# Altium PCB serdes-interface.PcbDoc (part 1 of 3)
Units mm, origin at the board's own origin, x right, y up, seen from the top; angles counter-clockwise.
Board outline 39.62 x 39.62 mm, 6 copper layers (Top Layer, GND1, MidLayer1, VDD_negative, GND2, Bottom Layer); 177 components, 131 nets, 827 pads, 502 vias.
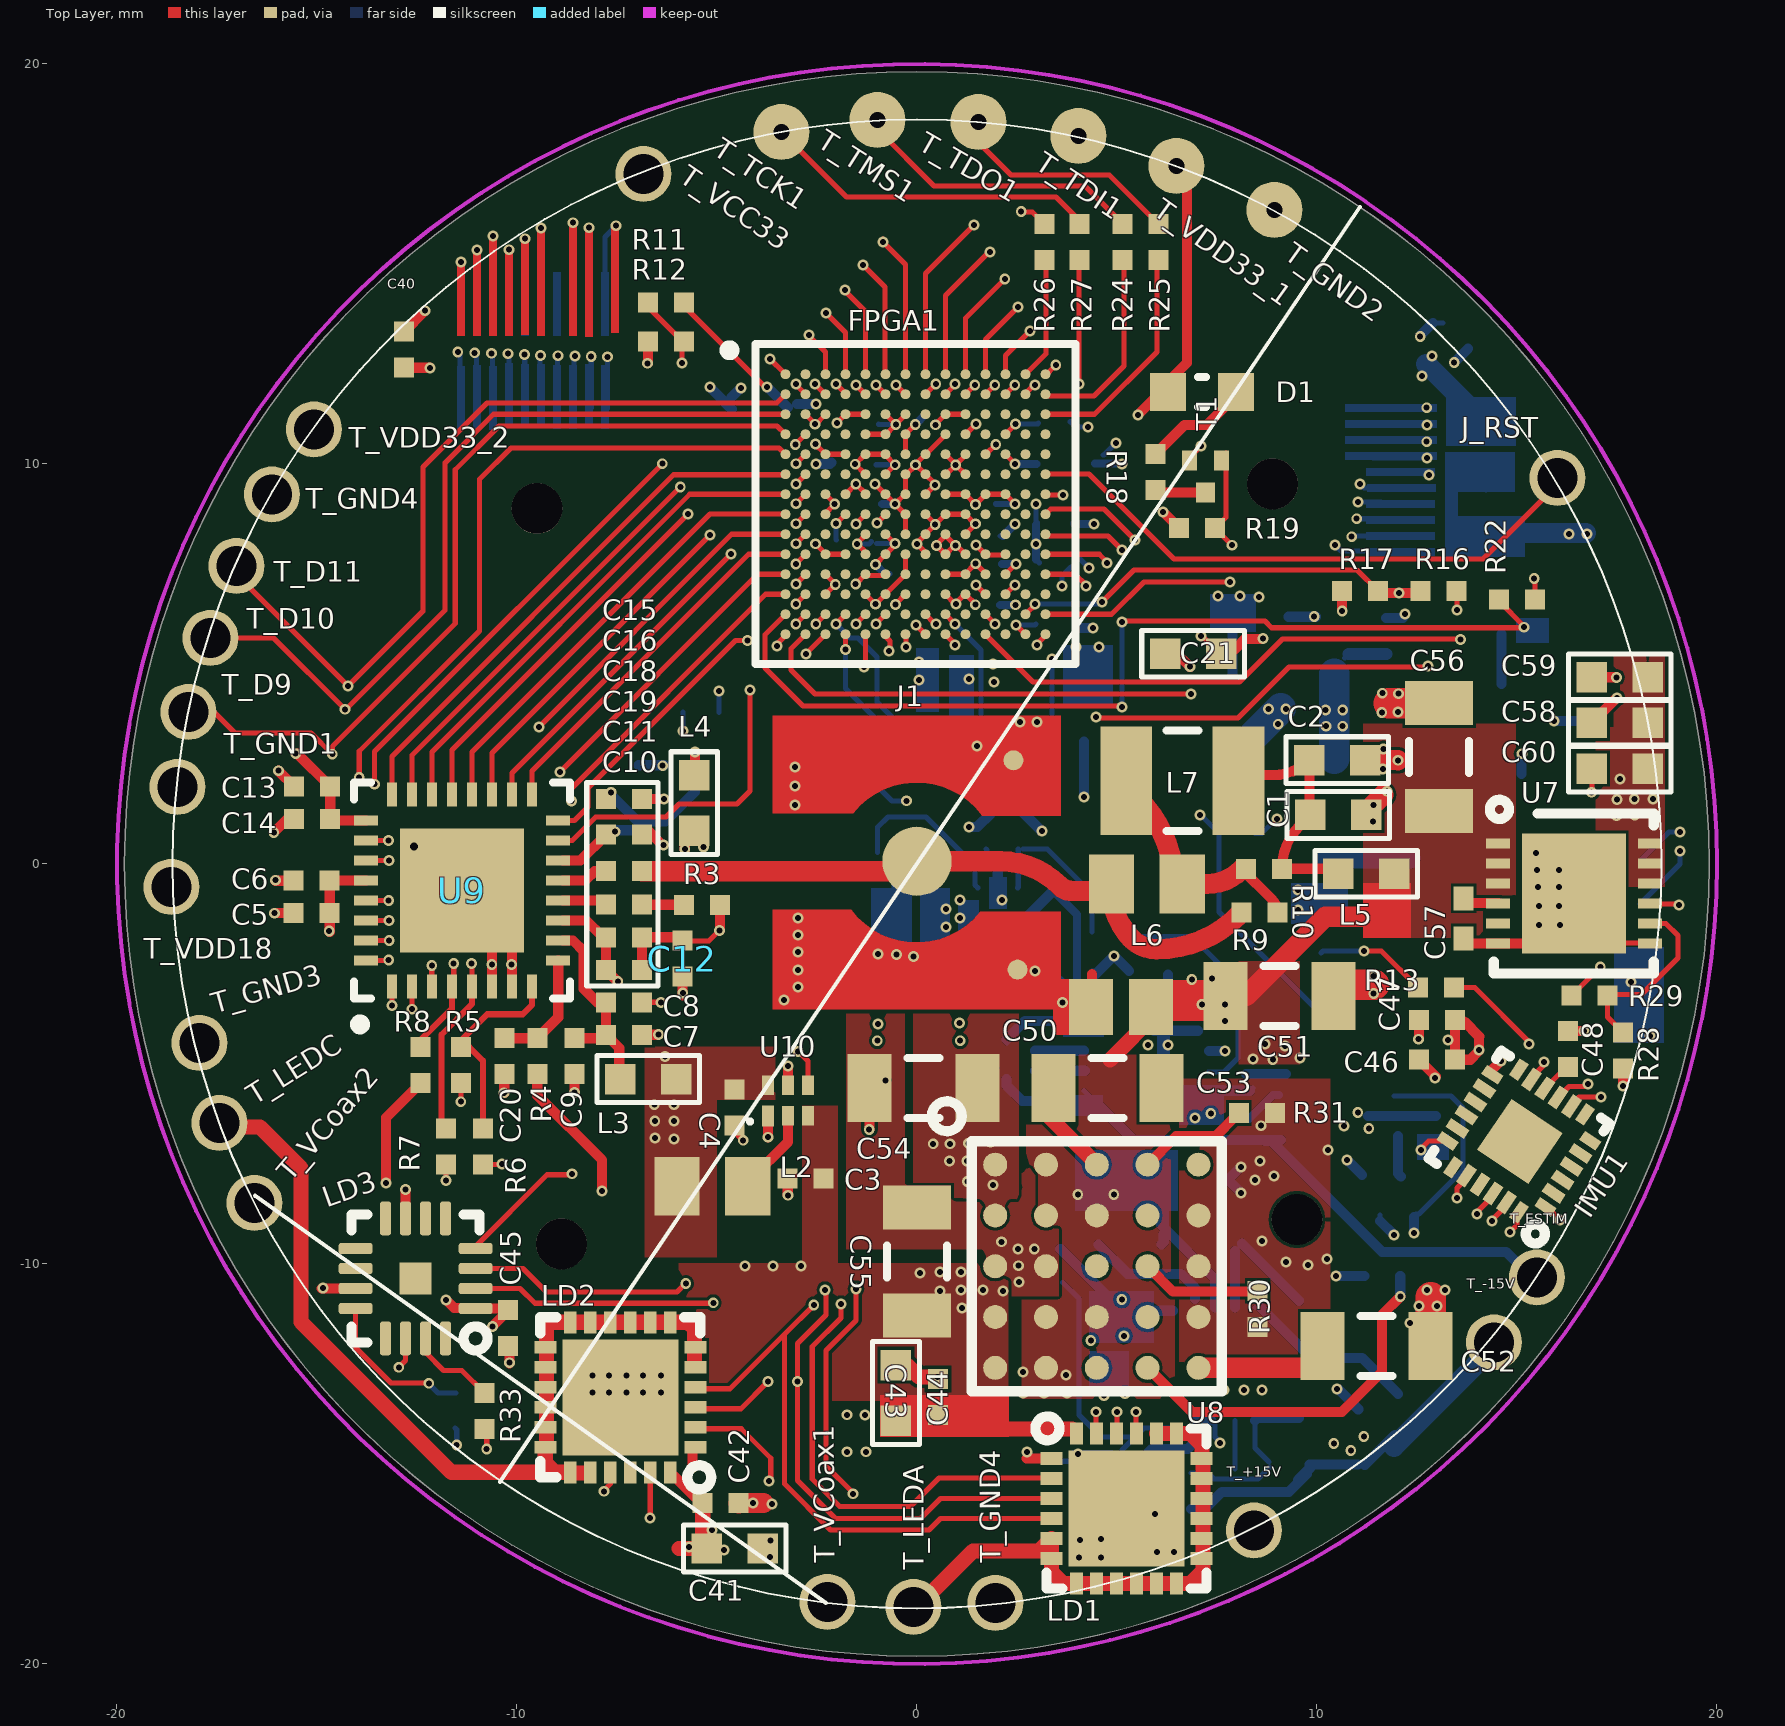
[diagram p0: Top Layer view]
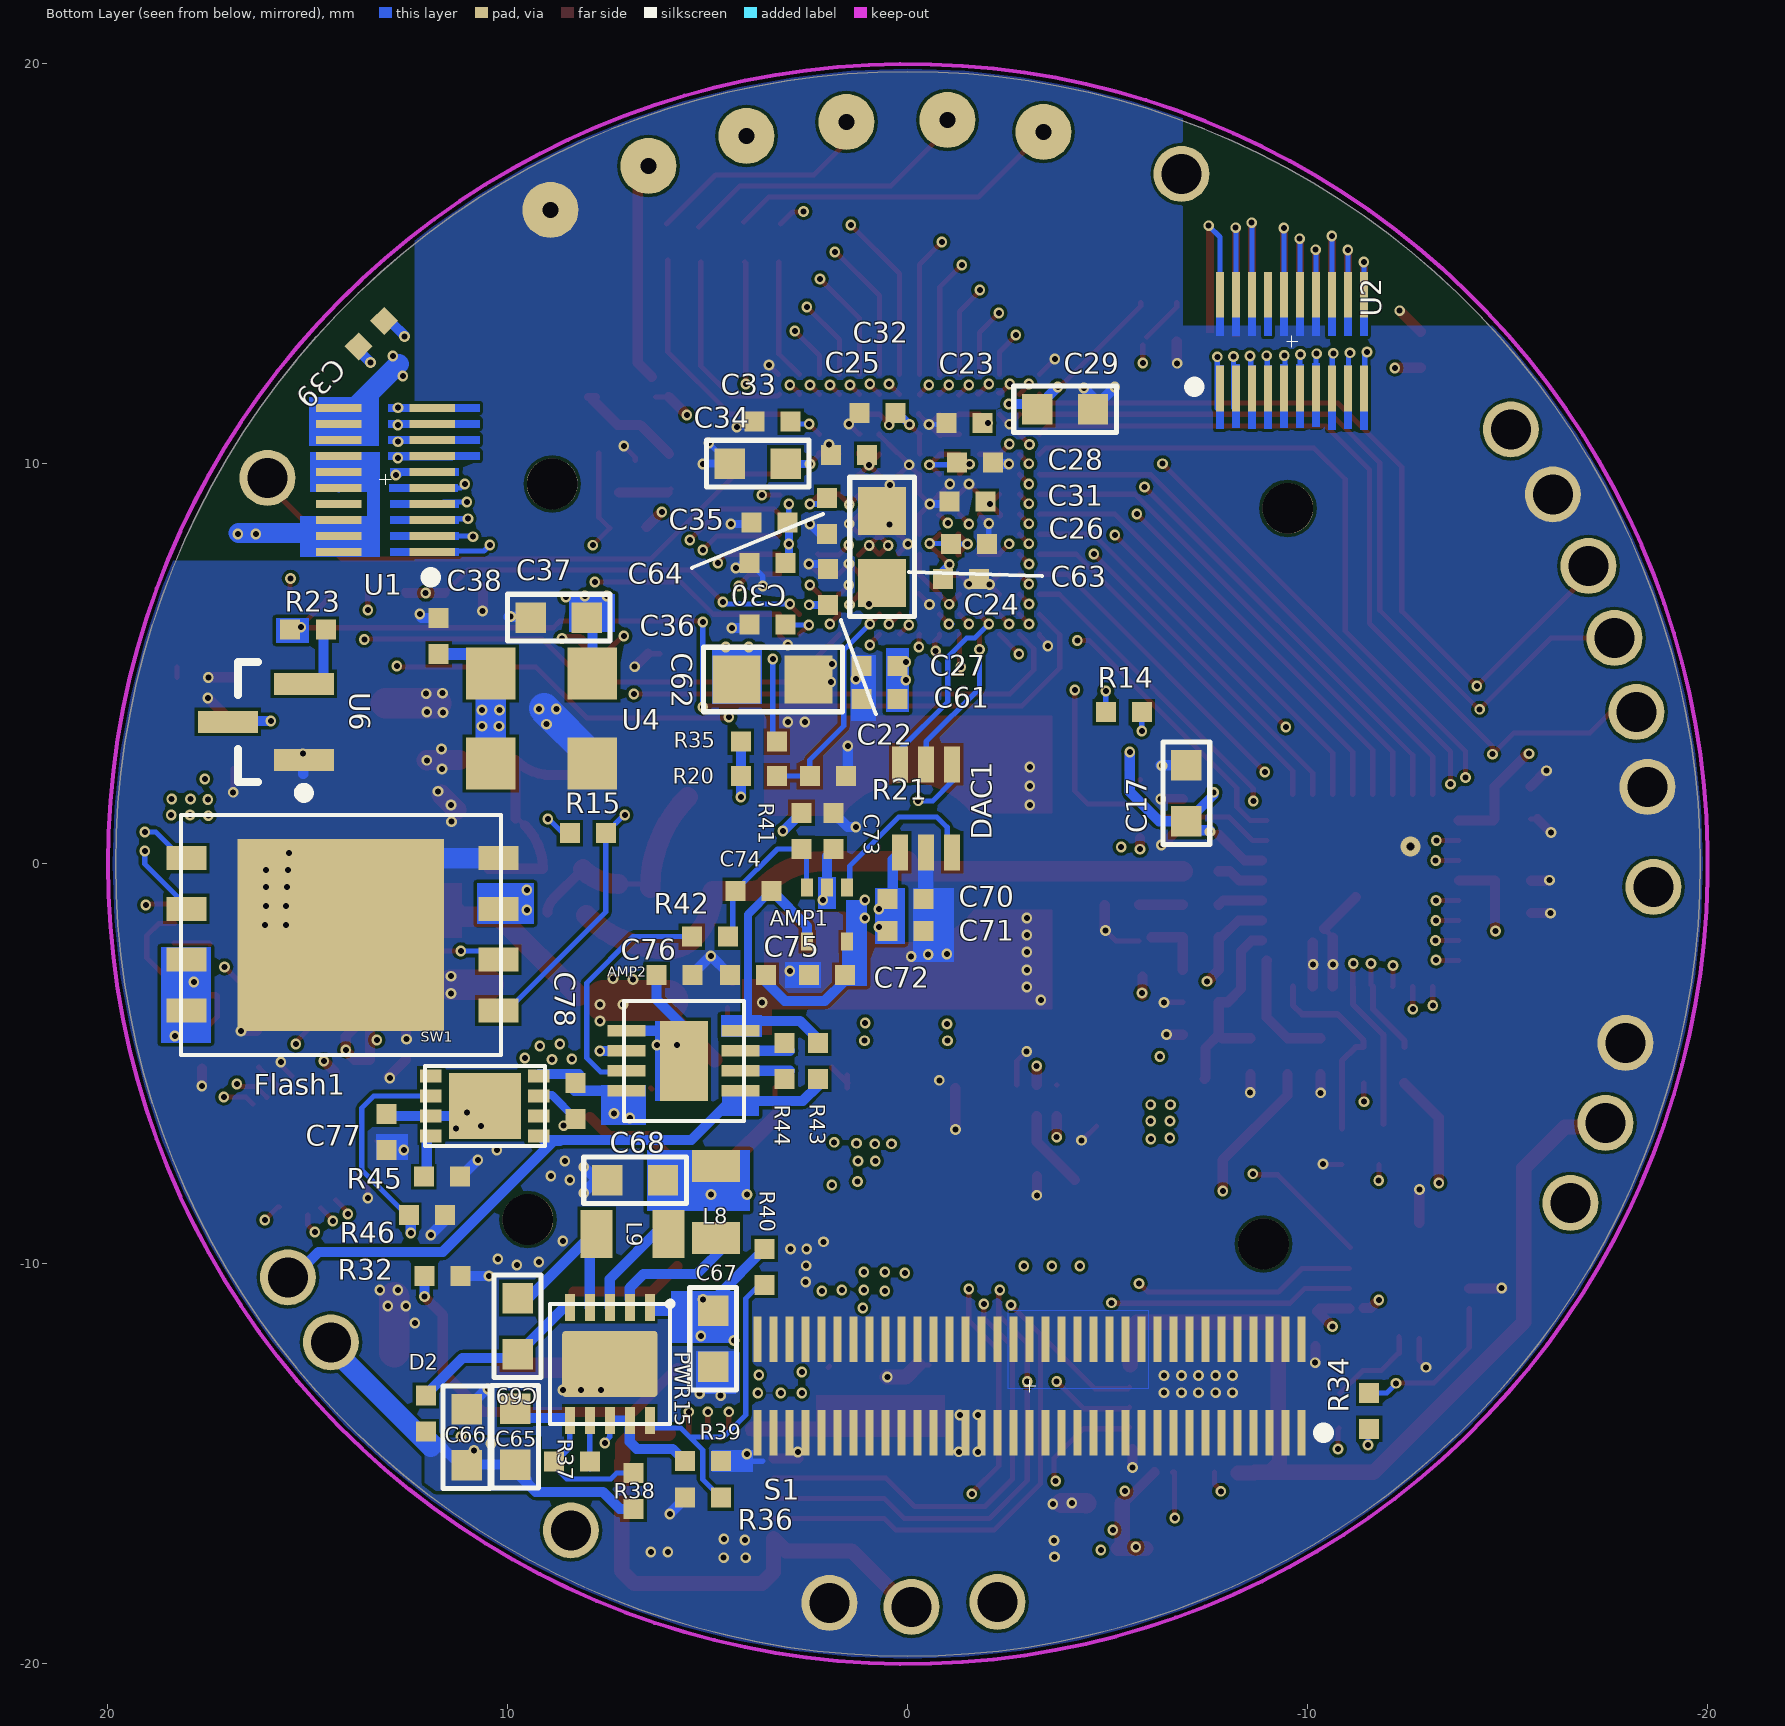
[diagram p1: Bottom Layer view, seen from below]
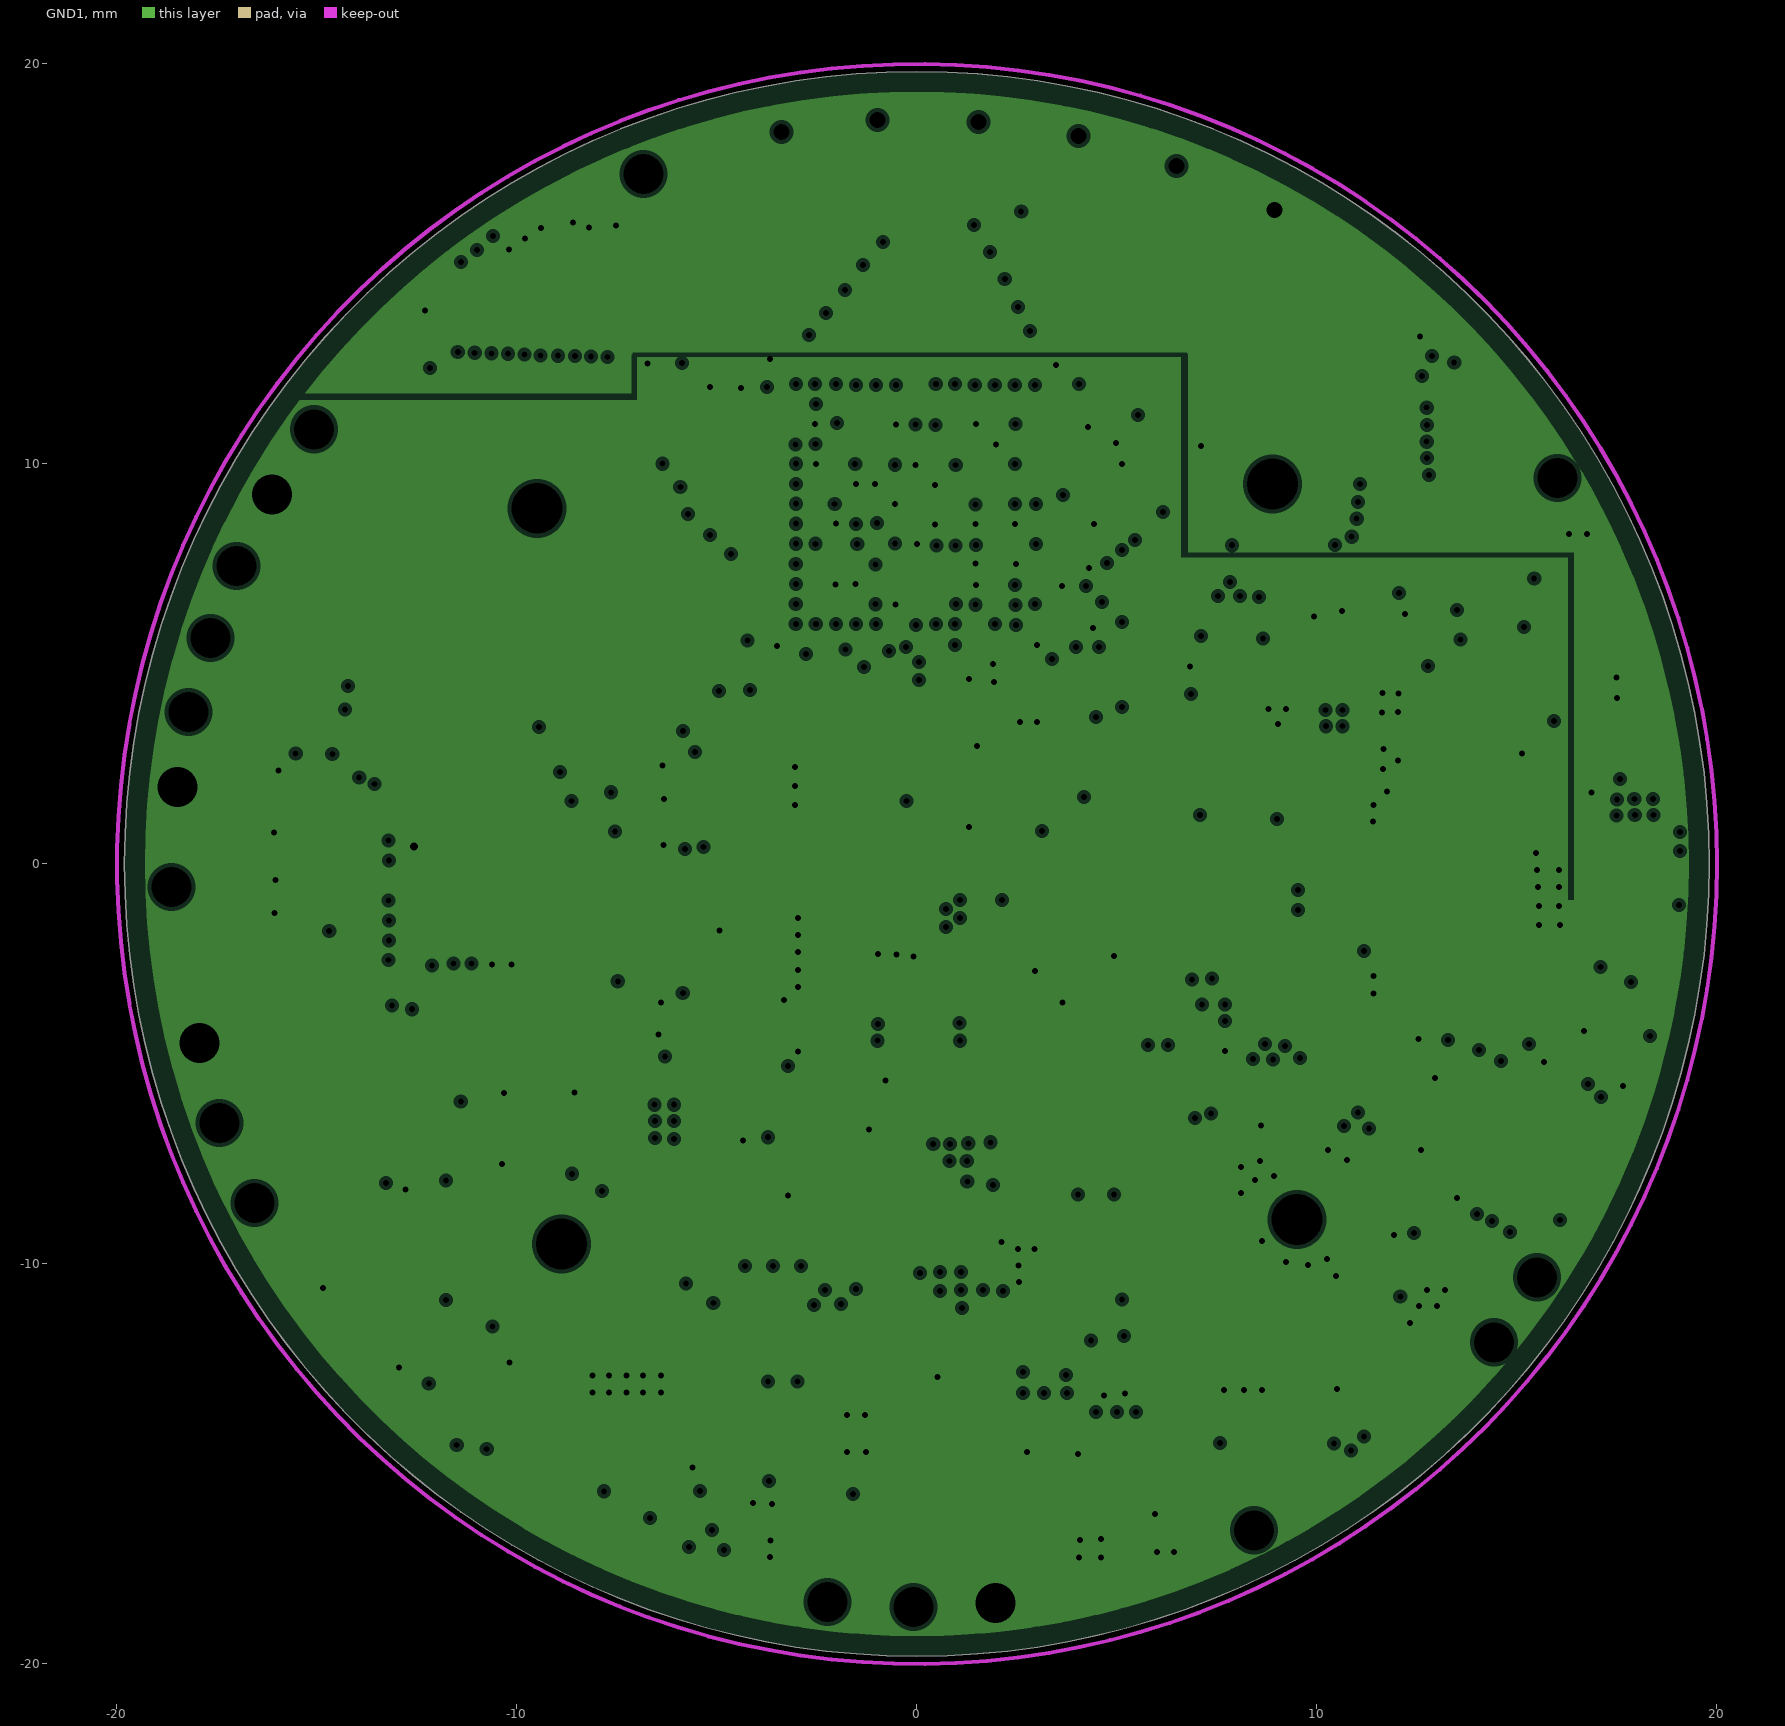
[diagram p2: GND1, clearances drawn from the general rule]
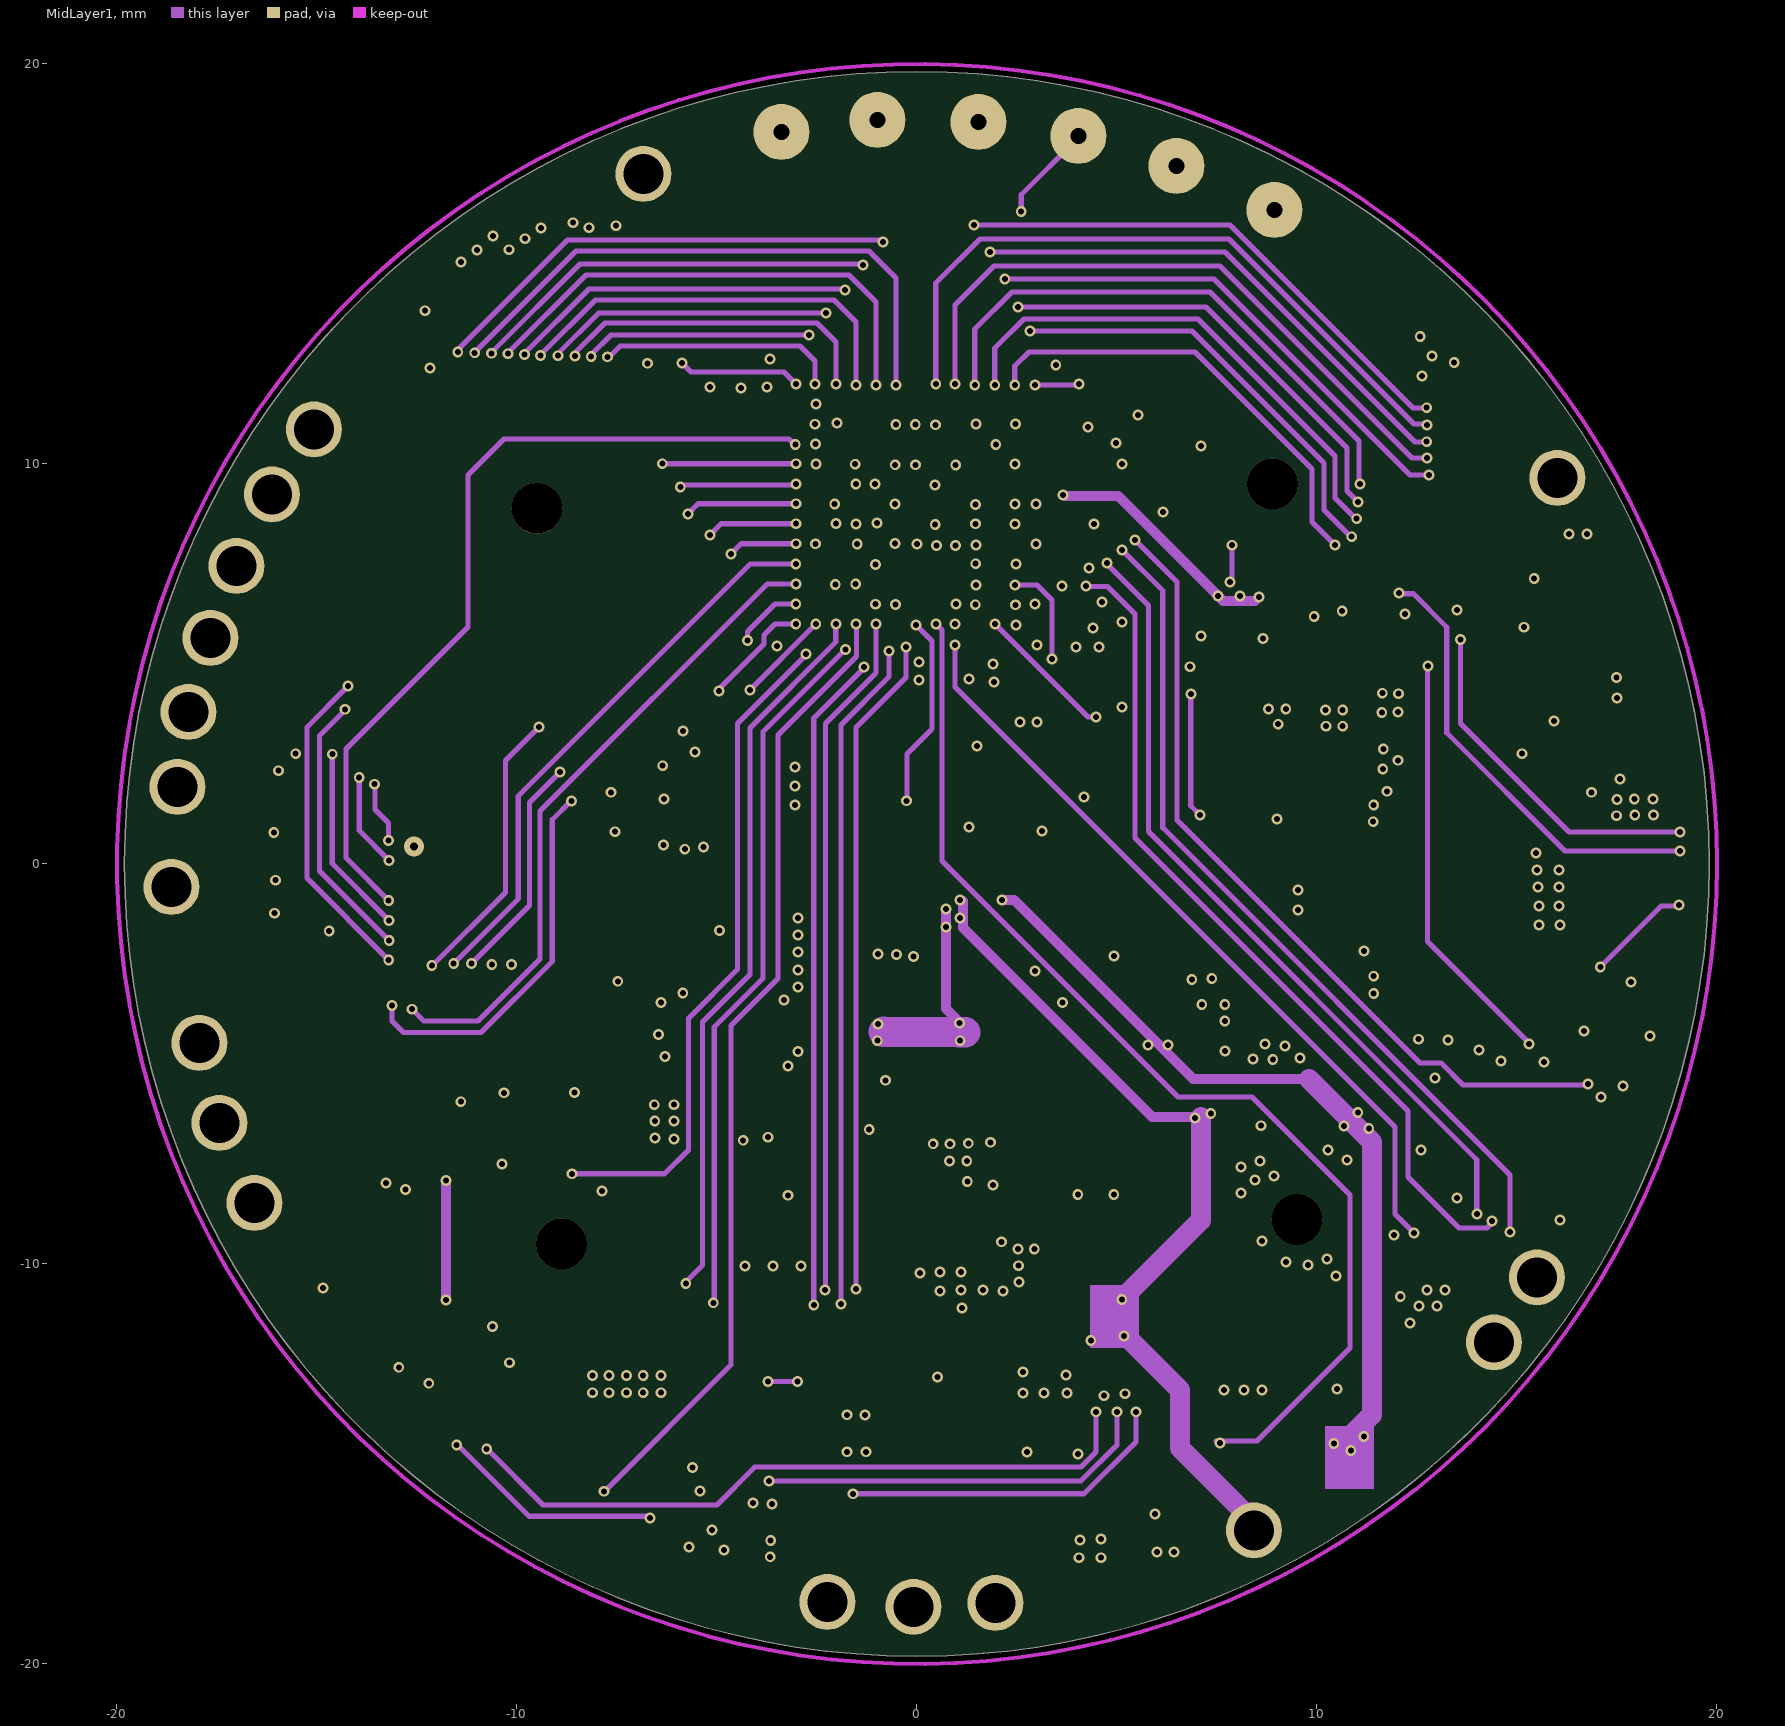
[diagram p3: MidLayer1]
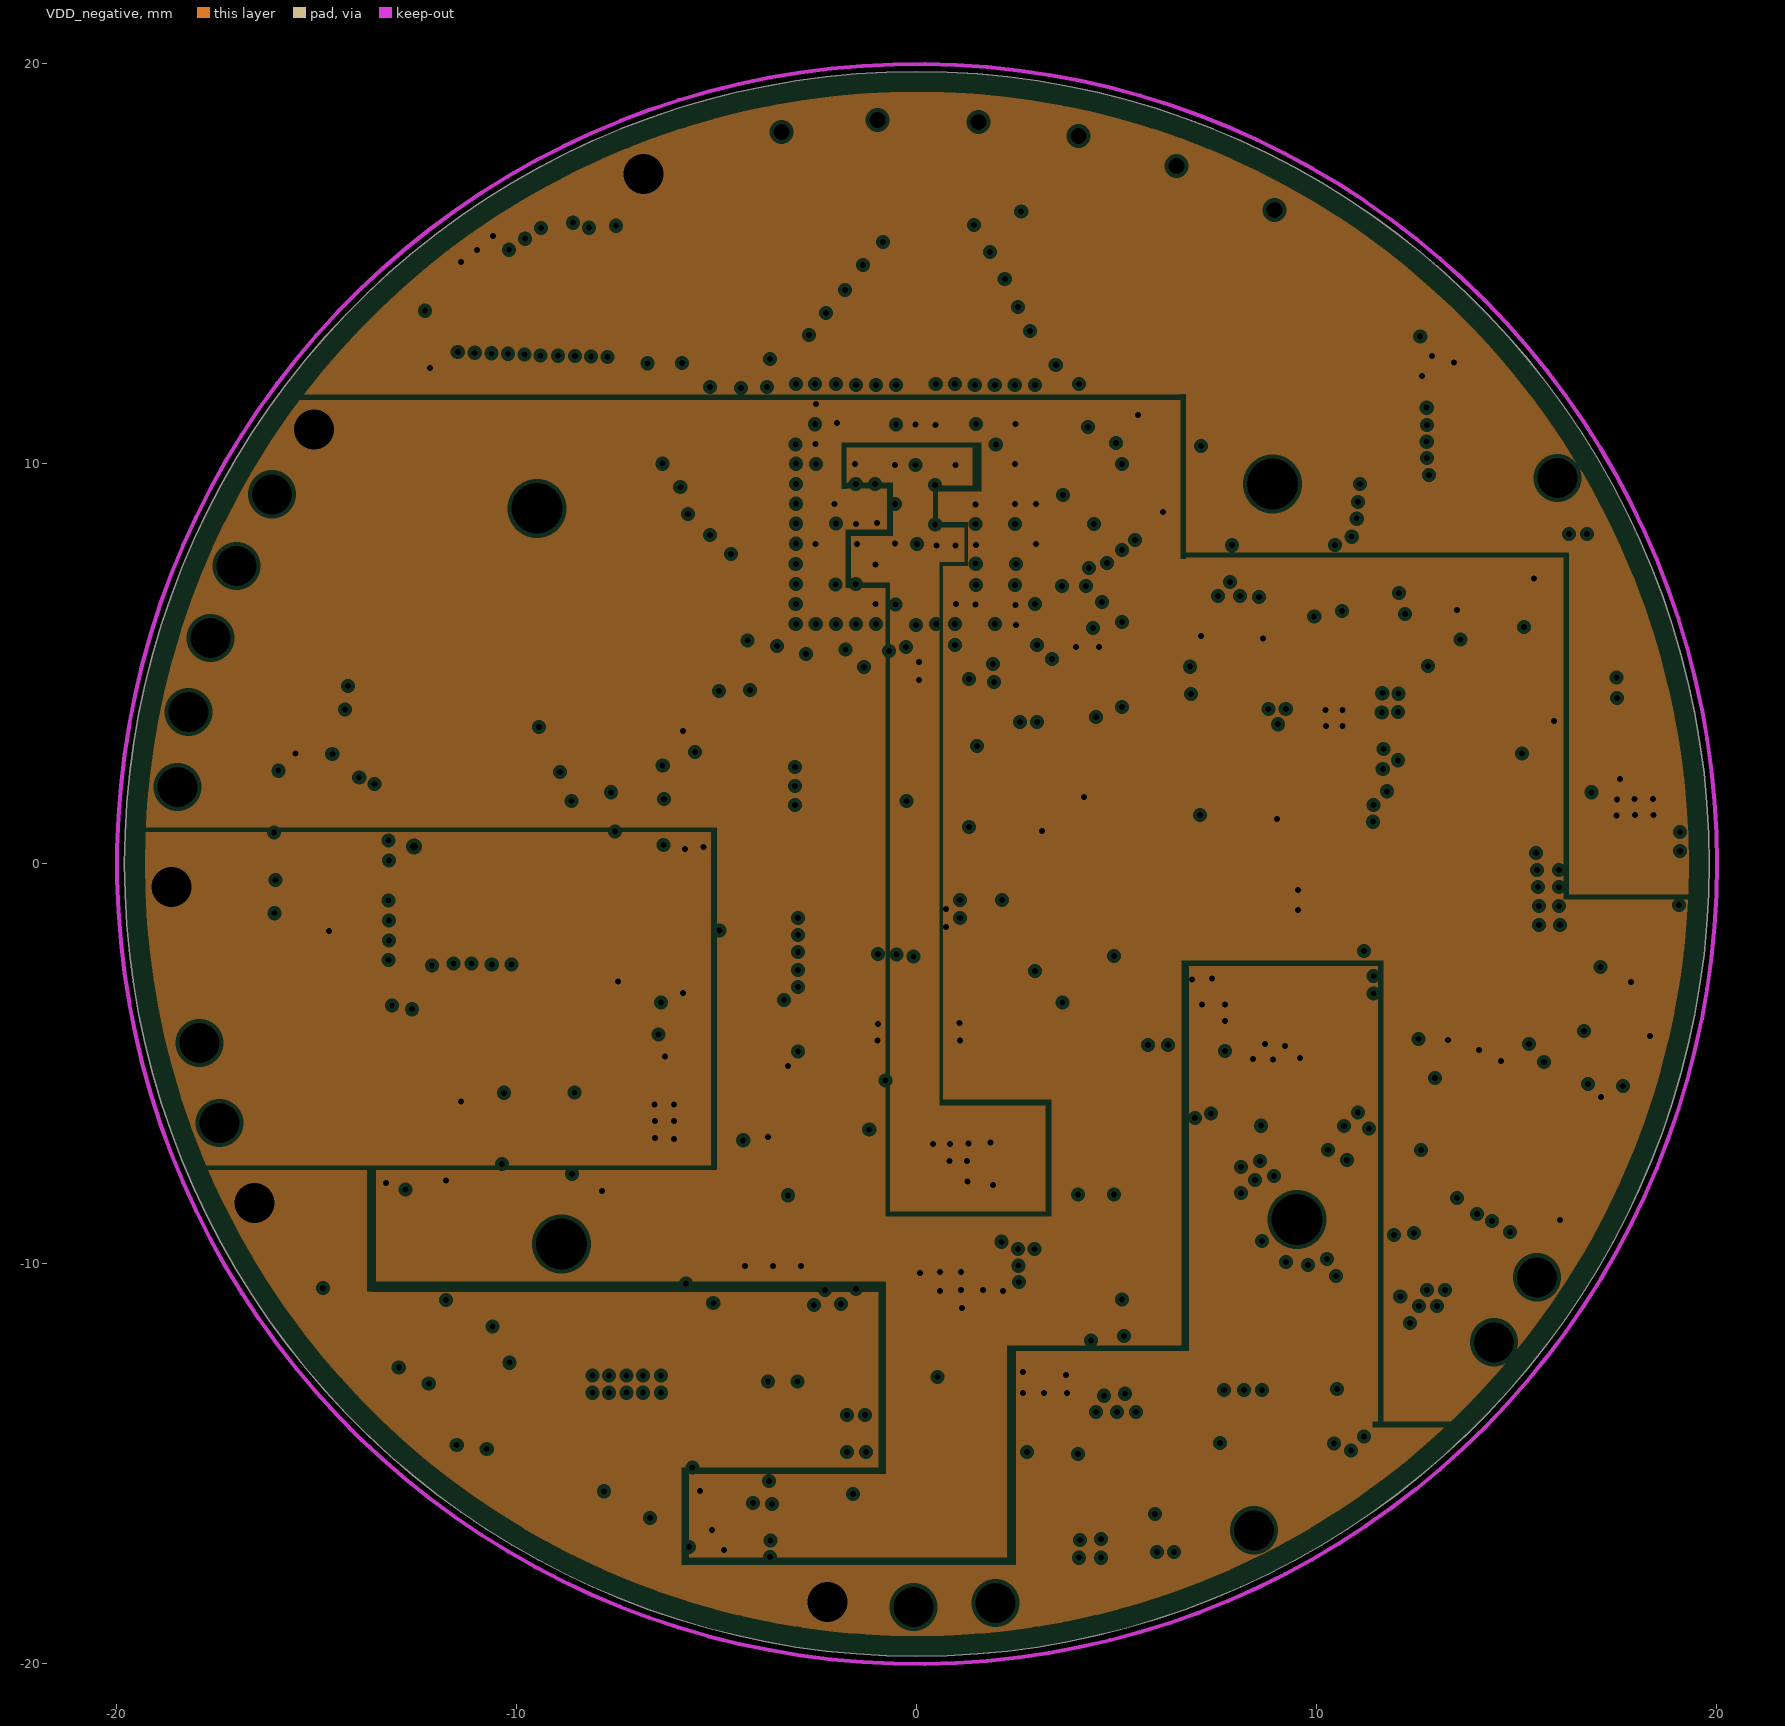
[diagram p4: VDD_negative, clearances drawn from the general rule]
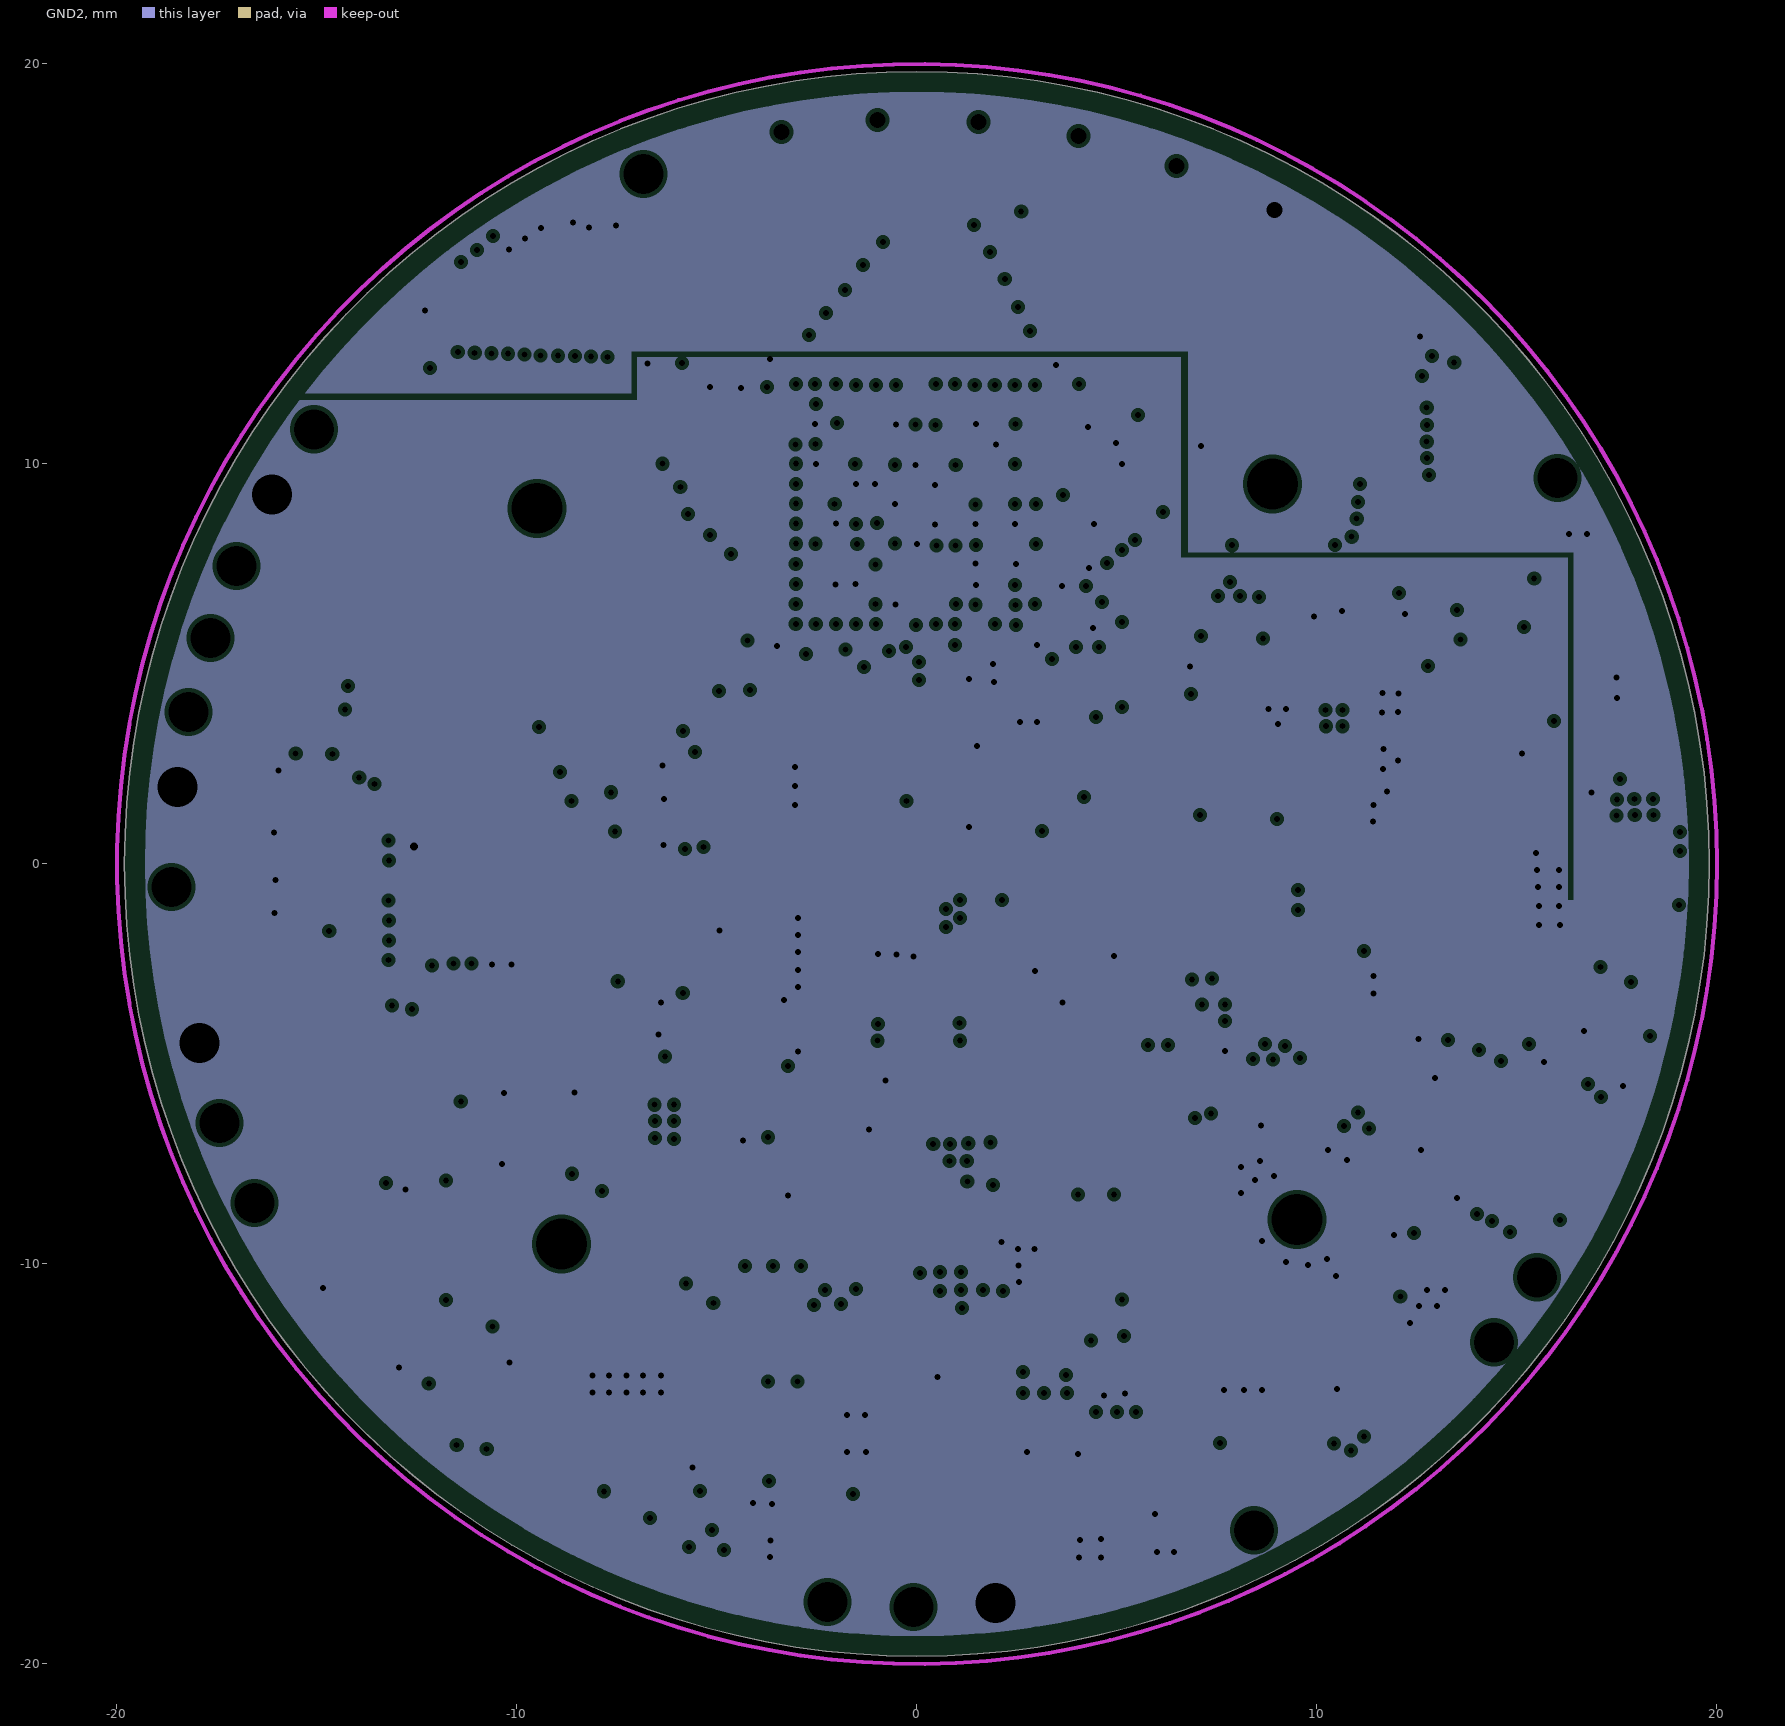
[diagram p5: GND2, clearances drawn from the general rule]

## Layer stack, top to bottom
Top Layer: signal copper 0.0356
Dielectric: core 0.32, FR-4, Dk 4.8
GND1: plane copper 0.0356, net GND
Dielectric: prepreg 0.32, FR-4, Dk 4.8
MidLayer1: signal copper 0.0356
Dielectric: core 0.32, FR-4, Dk 4.8
VDD_negative: plane copper 0.0356, net (Multiple Nets)
Dielectric: prepreg 0.32, FR-4, Dk 4.8
GND2: plane copper 0.0356, net GND
Dielectric: core 0.32, FR-4, Dk 4.8
Bottom Layer: signal copper 0.0356

## Board outline
-19.813,0 ccw(c-0.003,0) -0.003,-19.81 ccw(c-0.003,0) 19.807,0 ccw(c-0.003,0) -0.003,19.81 ccw(c-0.003,0)

## Design rules (kind name [scope] priority, off if disabled: settings)
Clearance [All] p1: gap=0.076
ComponentClearance [All] p1: gap=0.127 collisioncheckmode=3 verticalgap=0.254 showdistances=FALSE
HoleSize [All] p1: absolutevalues=TRUE maxlimit=6.5 minlimit=0.15 maxpercent=80.000 minpercent=20.000
MinimumAnnularRing [All] p1: minimumring=0.06
MinimumSolderMaskSliver [All] p1: minsoldermaskwidth=0
PlaneClearance [All] p1: clearance=0.102
PlaneConnect [All] p1: planeconnectstyle=Direct reliefexpansion=0.508 reliefentries=4 reliefconductorwidth=0.254 reliefairgap=0.254
PolygonConnect [All] p1: connectstyle=Direct reliefconductorwidth=0.254 reliefentries=4 polygonreliefangle="90 Angle" airgapwidth=0.254
RoutingVias [All] p1: holewidth=0.254 width=0.559 viastyle="Through Hole" minholewidth=0.15 minwidth=0.27 maxholewidth=0.711 maxwidth=1.27
SilkToSilkClearance [All] p1: silktosilkclearance=0
SilkToSolderMaskClearance [IsPad] p1: minsilkscreentomaskgap=0 clearancetoexposedcopper=FALSE
SolderMaskExpansion [All] p1: expansion=0.025
Width [All] p1: maxlimit=2.54 minlimit=0.076 preferedwidth=0.13
21 further rules are at their usual default settings.

## Classes and differential pairs
net class DIN[0..11]: DIN0 DIN1 DIN2 DIN3 DIN4 DIN5 DIN6 DIN7 DIN8 DIN9 DIN10 DIN11
component class U_serial-io: C5 C6 C7 C8 C9 C10 C11 C12 C13 C14 C15 C16 C17 C18 C19 C20 L3 L4 R3 R4 R5 R6 R7 R8 U9
component class U_power-supplies: C3 C4 C50 C51 C52 C53 C54 C55 C56 C57 C58 C59 C60 L1 L2 Q5 Q15 Q16 Q17 Q22 Q38 R28 R29 R30 R31 R32 T_VCC2 T_VCC33 U7 U8 U10 Z24
component class U_Headstage_withFPGA_BGA_v2: C21 C22 C23 C24 C25 C26 C27 C28 C29 C30 C31 C32 C33 C34 C35 C36 C37 C38 C39 C40 C61 C62 C63 C64 D1 Flash1 FPGA1 J_RST R11 R12 R13 R14 R15 R16 R17 R18 R19 R20 R21 R22 R23 R24 R25 R26 R27 R35 S1 T1 T_D9 T_D10 T_D11 T_GND1 T_GND2 T_GND4 T_TCK1 T_TDI1 T_TDO1 T_TMS1 T_VDD18 T_VDD33_1 T_VDD33_2 U1 U2 U4 U6
component class U_coaxial-port: C1 C2 J1 L5 L6 L7 R9 R10
component class U_imu: C46 C47 C48 IMU1 Q11
component class U_led-driver: C41 C42 C43 C44 C45 LD1 LD2 LD3 Q2 R33 R34 T_GND4 T_LEDA T_LEDA1 T_LEDC T_LEDC1 T_VCoax1 T_VCoax2
component class U_estim: AMP1 AMP2 C65 C66 C67 C68 C69 C70 C71 C72 C73 C74 C75 C76 C77 C78 D2 DAC1 L8 L9 PWR15 R36 R37 R38 R39 R40 R41 R42 R43 R44 R45 R46 SW1 T_+15V T_-15V T_ESTIM

## Components (designator, comment, footprint, x,y, rotation, side; value= is the part's Value field where it differs from the comment)
AMP1 "OPA170AIDRLR" OPA170-DRL 1.575,-0.65 r0 bottom
AMP2 "INA826" INA826AIDRGR 4.1,-6.425 r90 bottom
C1 "X7R Ceramic" Cap-0603 10.554,1.181 r180 top
C2 "X7R Ceramic" Cap-0603 10.528,2.553 r180 top
C3 "X7R Ceramic" Cap_0402 -2.938,-7.813 r180 top
C4 "X7R Ceramic" Cap_0402 -4.603,-6.233 r270 top
C5 "X7R Ceramic" Cap_0402 -15.278,-1.181 r180 top
C6 "X7R Ceramic" Cap_0402 -15.278,-0.368 r180 top
C7 "X7R Ceramic" Cap_0402 -7.177,-4.318 r0 top
C8 "X7R Ceramic" Cap_0402 -7.177,-3.505 r0 top
C9 "X7R Ceramic" Cap_0402 -8.61,-4.953 r270 top
C10 "X7R Ceramic" Cap_0402 -7.177,-2.692 r0 top
C11 "X7R Ceramic" Cap_0402 -7.177,-1.88 r0 top
C12 "X7R Ceramic" Cap_0402 -5.817,-2.222 r90 top
C13 "X7R Ceramic" Cap_0402 -15.265,1.981 r180 top
C14 "X7R Ceramic" Cap_0402 -15.265,1.168 r180 top
C15 "X7R Ceramic" Cap_0402 -7.177,1.575 r0 top
C16 "X7R Ceramic" Cap_0402 -7.177,0.686 r0 top
C17 "X7R Ceramic" Cap-0603 -7.007,1.786 r270 bottom
C18 "X7R Ceramic" Cap_0402 -7.177,-0.229 r0 top
C19 "X7R Ceramic" Cap_0402 -7.177,-1.067 r0 top
C20 "X7R Ceramic" Cap_0402 -10.363,-4.953 r270 top
C21 "X7R Ceramic" Cap-0603 6.883,5.296 r0 top
C22 "X7R Ceramic" Cap_0402 1.954,7.069 r90 bottom
C23 "X7R Ceramic" Cap_0402 -1.275,11.075 r0 bottom
C24 "X7R Ceramic" Cap_0402 -1.469,7.08 r180 bottom
C25 "X7R Ceramic" Cap_0402 1.611,10.271 r0 bottom
C26 "X7R Ceramic" Cap_0402 -1.675,7.95 r180 bottom
C27 "X7R Ceramic" Cap_0402 0.85,5 r0 bottom
C28 "X7R Ceramic" Cap_0402 -1.829,9.993 r180 bottom
C29 "X7R Ceramic" Cap-0603 -3.95,11.325 r0 bottom
C30 "X7R Ceramic" Cap_0402 3.65,7.575 r0 bottom
C31 "X7R Ceramic" Cap_0402 -1.349,9.104 r0 bottom
C32 "X7R Ceramic" Cap_0402 0.9,11.325 r0 bottom
C33 "X7R Ceramic" Cap_0402 3.525,11.102 r0 bottom
C34 "X7R Ceramic" Cap-0603 3.775,10.05 r180 bottom
C35 "X7R Ceramic" Cap_0402 3.602,8.577 r0 bottom
C36 "X7R Ceramic" Cap_0402 3.658,6.036 r0 bottom
C37 "X7R Ceramic" Cap-0603 8.75,6.2 r180 bottom
C38 "X7R Ceramic" Cap_0402 11.684,5.842 r90 bottom
C39 "X7R Ceramic" Cap_0402 13.275,13.325 r135 bottom
C40 "X7R Ceramic" Cap_0402 -12.775,13 r90 top
C41 "Cap" Cap-0603 -4.534,-17.158 r180 top
C42 "Cap" Cap_0402 -4.763,-16.027 r0 top
C43 "Cap" Cap-0603 -0.483,-13.208 r270 top
C44 "Cap" Cap_0402 0.572,-13.183 r90 top
C45 "Cap" Cap_0402 -10.175,-11.453 r90 top
C46 "Cap" Cap_0402 13.144,-4.94 r0 top
C47 "Cap" Cap_0402 13.144,-3.95 r0 top
C48 "Cap" Cap_0402 16.231,-4.775 r270 top
C50 "25V, DNP" C0805 5.1,-3.575 r0 top (schematic designator Q30)
C51 "25V" C1206 9.068,-3.302 r180 top (schematic designator Q31)
C52 "25V" C1206 11.493,-12.052 r180 top (schematic designator Q35)
C53 "25V" C1206 4.763,-5.601 r180 top (schematic designator Q34)
C54 "16V" C1206 0.165,-5.601 r0 top (schematic designator Q33)
C55 "16V" C1206 0,-9.944 r270 top (schematic designator Q32)
C56 "25V" C1206 13.056,2.667 r270 top (schematic designator Q25)
C57 "" 0402 13.665,-1.359 r90 top (schematic designator Q29)
C58 "Cap Semi" Cap-0603 17.552,3.569 r0 top
C59 "Cap Semi" Cap-0603 17.552,4.712 r0 top
C60 "Cap Semi" Cap-0603 17.552,2.426 r0 top (schematic designator Q28)
C61 "X7R Ceramic" Cap_0402 0.85,4.175 r0 bottom
C62 "X7R Ceramic" Cap-0805 3.164,4.563 r0 bottom
C63 "X7R Ceramic" Cap-0805 0.598,8.139 r270 bottom
C64 "X7R Ceramic" Cap_0402 2.061,8.556 r270 bottom
C65 "X7R Ceramic" Cap-0603 9.775,-14.3 r270 bottom
C66 "X7R Ceramic" Cap-0603 11.075,-14.35 r90 bottom
C67 "X7R Ceramic" Cap-0603 4.825,-11.85 r270 bottom
C68 "X7R Ceramic" Cap-0603 6.8,-7.95 r0 bottom
C69 "X7R Ceramic" Cap-0603 9.8,-11.575 r90 bottom
C70 "X7R Ceramic" Cap_0402 0.2,-0.825 r0 bottom
C71 "X7R Ceramic" Cap_0402 0.2,-1.625 r0 bottom
C72 "X7R Ceramic" Cap_0402 1.875,-2.825 r180 bottom
C73 "X7R Ceramic" Cap_0402 1.9,0.675 r270 bottom
C74 "X7R Ceramic" Cap_0402 4,-0.625 r0 bottom
C75 "X7R Ceramic" Cap_0402 3.85,-2.825 r180 bottom
C76 "X7R Ceramic" Cap_0402 5.975,-2.725 r0 bottom
C77 "X7R Ceramic" Cap_0402 13.075,-6.85 r270 bottom
C78 "X7R Ceramic" Cap_0402 8.35,-6.075 r270 bottom
D1 "GREEN" RES_0603 7.125,11.8 r0 top
D2 "VSKY05401006" Cap_0402 12,-13.6 r90 bottom
DAC1 "DAC5311" DAC5311 -1.1,2.625 r0 bottom
Flash1 "M25P32" M25P32-MLP8 10.175,1.225 r0 bottom
FPGA1 "XC6SLX16-2CPG196C" CPG196 -0.038,8.992 r0 top locked
IMU1 "MPU90250" QFN24-3x3mm 15.05,-6.925 r146 top
J1 "Coax Connector" SMA_132134-10-ND 0,0 r270 top locked
J_RST "Header_1PIN" JUMPER1PIN#1 17.125,8.25 r90 top
L2 "Ferrite Bead" LQM21PN2R2MC0D -5.343,-8.139 r0 top
L3 "Ferrite Bead" BLM18KG601SN1D -7.315,-5.537 r0 top
L4 "Ferrite Bead" BLM18KG601SN1D -5.408,0.927 r90 top
L5 "Ferrite Bead" BLM18KG601SN1D 11.824,-0.089 r180 top
L6 "Ferrite Bead" CIG21L4R7MNE 5.766,-0.445 r0 top
L7 "Ferrite Bead" CBC3225T101MR 6.591,2.083 r180 top
L8 "Ferrite Bead" MLZ2012M100WT000 4.7,-7.55 r270 bottom
L9 "Ferrite Bead" MLZ2012M100WT000 5.975,-9.35 r0 bottom
LD1 "CAT4016" TQFN24-4x4mm 5.261,-16.112 r0 top locked
LD2 "CAT4016" TQFN24-4x4mm -7.442,-13.335 r180 top
LD3 "TPL0202-10RUCR" WQFN16-3X3mm -12.535,-10.363 r180 top locked
PWR15 "LT3463" LT3463 5.95,-11 r0 bottom
R3 "Res1" Res_0402 -5.372,-1.016 r180 top
R4 "Res1" Res_0402 -9.474,-4.807 r90 top
R5 "Res1" Res_0402 -11.379,-5.029 r90 top
R6 "Res1" Res_0402 -10.871,-7.061 r270 top
R7 "Res1" Res_0402 -11.76,-7.061 r90 top
R8 "Res1" Res_0402 -12.395,-5.029 r90 top
R9 "Res1" Res_0402 8.56,-1.232 r0 top
R10 "Res1" Res_0402 8.674,-0.14 r0 top
R11 "Res1" Res_0402 -6.275,14.05 r180 top
R12 "Res1" Res_0402 -6.275,13.075 r180 top
R13 "Res1" Res_0402 12.975,-3.075 r180 top
R14 "Res1" Res_0402 -5.4,3.775 r180 bottom
R15 "Res1" Res_0402 8,0.75 r180 bottom
R16 "Res1" Res_0402 13.043,6.845 r180 top
R17 "Res1" Res_0402 11.074,6.845 r180 top
R18 "Res1" Res_0402 5.95,9.8 r270 top
R19 "Res1" Res_0402 7,8.375 r0 top
R20 "Res1" Res_0402 3.725,2.175 r180 bottom (schematic designator Z12)
R21 "Res1" Res_0402 2,2.175 r180 bottom (schematic designator Z13)
R22 "Res1" Res_0402 14.999,6.591 r0 top (schematic designator Z7)
R23 "Res1" Res_0402 15,5.875 r0 bottom (schematic designator Z8)
R24 "Res1" Res_0402 5.15,15.55 r90 top (schematic designator Z5)
R25 "Res1" Res_0402 6.05,15.55 r90 top (schematic designator Z4)
R26 "Res1" Res_0402 3.2,15.55 r90 top (schematic designator Z3)
R27 "Res1" Res_0402 4.075,15.55 r90 top (schematic designator Z6)
R28 "Res1" Res_0402 17.666,-4.661 r90 top (schematic designator Z19)
R29 "Res1" Res_0402 16.815,-3.277 r180 top (schematic designator Z18)
R30 "DNP" Res_0402 8.534,-11.125 r90 top (schematic designator Z20)
R31 "649k (DNP)" Res_0402 8.496,-6.21 r180 top (schematic designator Z21)
R32 "" Res_0402 11.633,-10.287 r0 bottom (schematic designator Z22)
R33 "Res1" Res_0402 -10.795,-13.678 r90 top (schematic designator Z30)
R34 "Res1" Res_0402 -11.55,-13.675 r90 bottom (schematic designator Z31)
R35 "Res1" Res_0402 3.725,3.075 r0 bottom (schematic designator Z33)
R36 "Res1" Res_0402 5.125,-15.825 r0 bottom
R37 "Res1" Res_0402 8.4,-14.925 r0 bottom
R38 "Res1" Res_0402 6.875,-15.675 r270 bottom
R39 "Res1" Res_0402 5.125,-14.95 r180 bottom
R40 "Res1" Res_0402 3.6,-10.075 r270 bottom
R41 "Res1" Res_0402 2.675,0.825 r270 bottom
R42 "Res1" Res_0402 4.95,-1.8 r0 bottom
R43 "Res1" Res_0402 2.225,-4.925 r90 bottom
R44 "Res1" Res_0402 3.1,-4.925 r270 bottom
R45 "Res1" Res_0402 11.65,-7.8 r0 bottom
R46 "Res1" Res_0402 12.025,-8.8 r180 bottom
S1 "Hirose-DF40-70pins" "DF40 - 70" -3.048,-13.056 r0 bottom
SW1 "ADG1401BCPZ" ADG1401BCPZ 9.075,-7.05 r90 bottom
T1 "DTC143EE" VMT3 7.525,10.2 r180 top
T_+15V "Header_1PIN" JUMPER1PIN#1 7.025,-17.775 r0 top
T_-15V "Header_1PIN" JUMPER1PIN#1 13.025,-13.075 r0 top
T_D9 "Header_1PIN" JUMPER1PIN#1 -17.1,2.4 r90 top
T_D10 "Header_1PIN" JUMPER1PIN#1 -16.55,4.25 r90 top
T_D11 "Header_1PIN" JUMPER1PIN#1 -15.9,6.05 r90 top
T_ESTIM "Header_1PIN" JUMPER1PIN#1 14.1,-11.45 r0 top
T_GND1 "Header_1PIN" JUMPER1PIN#1 -17.375,0.525 r90 top
T_GND2 "Header_1PIN" JUMPER1PIN#2 10.05,14.95 r90 top
T_GND3 "Header_1PIN" JUMPER1PIN#1 -16.825,-5.875 r90 top
T_GND4 "Header_1PIN" JUMPER1PIN#1 -17.525,8.125 r0 top
T_GND4 "Header_1PIN" JUMPER1PIN#1 3.075,-19.875 r90 top
T_LEDA "Header_1PIN" JUMPER1PIN#1 1.026,-19.974 r90 top
T_LEDC "Header_1PIN" JUMPER1PIN#1 -16.325,-7.875 r90 top
T_TCK1 "Header_1PIN" JUMPER1PIN#2 -2.275,16.9 r90 top
T_TDI1 "Header_1PIN" JUMPER1PIN#2 5.15,16.8 r90 top
T_TDO1 "Header_1PIN" JUMPER1PIN#2 2.65,17.15 r90 top
T_TMS1 "Header_1PIN" JUMPER1PIN#2 0.125,17.2 r90 top
T_VCC33 "Header_1PIN" JUMPER1PIN#1 -5.725,15.85 r90 top
T_VCoax1 "Header_1PIN" JUMPER1PIN#1 -1.125,-19.85 r90 top
T_VCoax2 "Header_1PIN" JUMPER1PIN#1 -15.45,-9.875 r90 top
T_VDD18 "Header_1PIN" JUMPER1PIN#1 -17.525,-1.975 r90 top
T_VDD33_1 "Header_1PIN" JUMPER1PIN#2 7.6,16.05 r90 top
T_VDD33_2 "Header_1PIN" JUMPER1PIN#1 -16.475,9.75 r0 top
U1 "Hirose-DF40C" DF40 13.056,9.601 r90 bottom locked
U2 "Hirose-DF40C" DF40 -9.601,13.056 r180 bottom
U4 "FXO-HC53100.8" FXO-HC53 10.427,2.515 r180 bottom
U6 "LM809M3-3.08" SOT23 16.05,3.55 r0 bottom
U7 "LP38798" DFN12 16.421,-0.737 r0 top
U8 "LTM4622" LGA5x5 4.496,-10.058 r0 top locked
U9 "DS90UR913A" WQFN32-DS90UB913A -11.252,-0.457 r90 top locked
U10 "TPS62231DRYT" TPS62231DRYT -3.252,-5.946 r0 top

## Footprints (in the part's own frame and the unit in brackets; to place one, negate y for a bottom-side part, rotate by r counter-clockwise, add the part's x,y. Pads: shape width x height; smd on the part's side, far side on the other; paste and mask are expansions set on the pad)
0402 [mm] "Chip Capacitor, Body 1.0x0.5mm, IPC High Density"
  rect 0.6x0.5 smd: 1(-0.5,0) 2(0.5,0)
  body extent -0.55,-0.3 0.55,0.3, height 1.3
ADG1401BCPZ [mm]
  rect 0.32x0.54 smd mask+0.05: 1(0.25,0.149) 2(0.75,0.149) 3(1.25,0.149) 4(1.75,0.149) 5(1.75,2.849) 6(1.25,2.849) 7(0.75,2.849) 8(0.25,2.849)
  rect 1.65x1.8 smd mask+0.05: 7(1,1.5)
  silkscreen extent 0,0 2,3
BLM18KG601SN1D [mil]
  rect 30x30 smd: 1(50.93,6.25) 2(-4.07,6.25)
  silkscreen extent -27,-17 74,29, body extent -8,-9 55,21, height 19
C0805 [mm] "Chip Capacitor, Body 2.0x1.3mm, IPC High Density"
  rect 1.1x1.4 smd: 1(-0.75,0) 2(0.75,0)
  body extent -1.1,-0.72 1.1,0.72, height 1.4
C1206 [mm] "Chip Capacitor, Body 3.2x1.6mm, IPC High Density"
  rect 1.1x1.7 smd: 1(-1.35,0) 2(1.35,0)
  silkscreen extent -0.4,-0.75 0.4,0.75, body extent -1.7,-0.9 1.7,0.9, height 1.3
Cap-0603 [mil] "0603 Capacitor"
  rect 30x30 smd: 1(-26.74,-1.7) 2(28.26,-1.7)
  silkscreen extent -50,-25 51,21, body extent -31,-17 32,13, height 19
Cap-0805 [mm] "0603 Capacitor"
  rect 1.2x1.2 smd: 1(-0.679,-0.043) 2(1.121,-0.043)
  silkscreen extent -1.53,-0.85 1.95,0.76
Cap_0402 [mm]
  rect 0.5x0.5 smd: 1(0.305,0.046) 2(-0.595,0.046)
  body extent -0.67,-0.23 0.38,0.32, height 0.5
CBC3225T101MR [mm]
  rect 1.29x2.72 smd: 1(1.362,0.003) 2(-1.448,0.003)
  silkscreen extent -0.44,-1.26 0.36,1.26, body extent -1.74,-1.35 1.66,1.35, height 2.7
CIG21L4R7MNE [mm]
  rect 1.13x1.47 smd: 1(-0.905,-0.056) 2(0.865,-0.056)
  body extent -1.12,-0.78 1.08,0.67, height 1.05
CPG196 [mm] "BGA, 196-Leads, Body 8x8mm, Pitch 0.5mm"
  round 0.25 smd: A1(-3.25,3.25) A2(-2.75,3.25) A3(-2.25,3.25) A4(-1.75,3.25) A5(-1.25,3.25) A6(-0.75,3.25) A7(-0.25,3.25) A8(0.25,3.25) A9(0.75,3.25) A10(1.25,3.25) A11(1.75,3.25) A12(2.25,3.25) A13(2.75,3.25) A14(3.25,3.25) B1(-3.25,2.75) B2(-2.75,2.75) B3(-2.25,2.75) B4(-1.75,2.75) B5(-1.25,2.75) B6(-0.75,2.75) B7(-0.25,2.75) B8(0.25,2.75) B9(0.75,2.75) B10(1.25,2.75) B11(1.75,2.75) B12(2.25,2.75) B13(2.75,2.75) B14(3.25,2.75) C1(-3.25,2.25) C2(-2.75,2.25) C3(-2.25,2.25) C4(-1.75,2.25) C5(-1.25,2.25) C6(-0.75,2.25) C7(-0.25,2.25) C8(0.25,2.25) C9(0.75,2.25) C10(1.25,2.25) C11(1.75,2.25) C12(2.25,2.25) C13(2.75,2.25) C14(3.25,2.25) D1(-3.25,1.75) D2(-2.75,1.75) D3(-2.25,1.75) D4(-1.75,1.75) D5(-1.25,1.75) D6(-0.75,1.75) D7(-0.25,1.75) D8(0.25,1.75) D9(0.75,1.75) D10(1.25,1.75) D11(1.75,1.75) D12(2.25,1.75) D13(2.75,1.75) D14(3.25,1.75) E1(-3.25,1.25) E2(-2.75,1.25) E3(-2.25,1.25) E4(-1.75,1.25) E5(-1.25,1.25) E6(-0.75,1.25) E7(-0.25,1.25) E8(0.25,1.25) E9(0.75,1.25) E10(1.25,1.25) E11(1.75,1.25) E12(2.25,1.25) E13(2.75,1.25) E14(3.25,1.25) F1(-3.25,0.75) F2(-2.75,0.75) F3(-2.25,0.75) F4(-1.75,0.75) F5(-1.25,0.75) F6(-0.75,0.75) F7(-0.25,0.75) F8(0.25,0.75) F9(0.75,0.75) F10(1.25,0.75) F11(1.75,0.75) F12(2.25,0.75) F13(2.75,0.75) F14(3.25,0.75) G1(-3.25,0.25) G2(-2.75,0.25) G3(-2.25,0.25) G4(-1.75,0.25) G5(-1.25,0.25) G6(-0.75,0.25) G7(-0.25,0.25) G8(0.25,0.25) G9(0.75,0.25) G10(1.25,0.25) G11(1.75,0.25) G12(2.25,0.25) G13(2.75,0.25) G14(3.25,0.25) H1(-3.25,-0.25) H2(-2.75,-0.25) H3(-2.25,-0.25) H4(-1.75,-0.25) H5(-1.25,-0.25) H6(-0.75,-0.25) H7(-0.25,-0.25) H8(0.25,-0.25) H9(0.75,-0.25) H10(1.25,-0.25) H11(1.75,-0.25) H12(2.25,-0.25) H13(2.75,-0.25) H14(3.25,-0.25) J1(-3.25,-0.75) J2(-2.75,-0.75) J3(-2.25,-0.75) J4(-1.75,-0.75) J5(-1.25,-0.75) J6(-0.75,-0.75) J7(-0.25,-0.75) J8(0.25,-0.75) J9(0.75,-0.75) J10(1.25,-0.75) J11(1.75,-0.75) J12(2.25,-0.75) J13(2.75,-0.75) J14(3.25,-0.75) K1(-3.25,-1.25) K2(-2.75,-1.25) K3(-2.25,-1.25) K4(-1.75,-1.25) K5(-1.25,-1.25) K6(-0.75,-1.25) K7(-0.25,-1.25) K8(0.25,-1.25) K9(0.75,-1.25) K10(1.25,-1.25) K11(1.75,-1.25) K12(2.25,-1.25) K13(2.75,-1.25) K14(3.25,-1.25) L1(-3.25,-1.75) L2(-2.75,-1.75) L3(-2.25,-1.75) L4(-1.75,-1.75) L5(-1.25,-1.75) L6(-0.75,-1.75) L7(-0.25,-1.75) L8(0.25,-1.75) L9(0.75,-1.75) L10(1.25,-1.75) L11(1.75,-1.75) L12(2.25,-1.75) L13(2.75,-1.75) L14(3.25,-1.75) M1(-3.25,-2.25) M2(-2.75,-2.25) M3(-2.25,-2.25) M4(-1.75,-2.25) M5(-1.25,-2.25) M6(-0.75,-2.25) M7(-0.25,-2.25) M8(0.25,-2.25) M9(0.75,-2.25) M10(1.25,-2.25) M11(1.75,-2.25) M12(2.25,-2.25) M13(2.75,-2.25) M14(3.25,-2.25) N1(-3.25,-2.75) N2(-2.75,-2.75) N3(-2.25,-2.75) N4(-1.75,-2.75) N5(-1.25,-2.75) N6(-0.75,-2.75) N7(-0.25,-2.75) N8(0.25,-2.75) N9(0.75,-2.75) N10(1.25,-2.75) N11(1.75,-2.75) N12(2.25,-2.75) N13(2.75,-2.75) N14(3.25,-2.75) P1(-3.25,-3.25) P2(-2.75,-3.25) P3(-2.25,-3.25) P4(-1.75,-3.25) P5(-1.25,-3.25) P6(-0.75,-3.25) P7(-0.25,-3.25) P8(0.25,-3.25) P9(0.75,-3.25) P10(1.25,-3.25) P11(1.75,-3.25) P12(2.25,-3.25) P13(2.75,-3.25) P14(3.25,-3.25)
  silkscreen extent -4.77,-4 4,4, body extent -4,-4 4,4, height 1.1
DAC5311 [mm]
  rect 0.4x0.9 smd mask+0.05: 1(-0.008,0.135) 2(0.642,0.135) 3(1.292,0.135) 4(1.292,2.335) 5(0.642,2.335) 6(-0.008,2.335)
DF40 [mm]
  rect 0.2x1.14 smd mask+0.05: 1(-1.8,1.17) 2(-1.4,1.17) 3(-1,1.17) 4(-0.6,1.17) 5(-0.2,1.17) 6(0.2,1.17) 7(0.6,1.17) 8(1,1.17) 9(1.4,1.17) 10(1.8,1.17) 11(1.8,-1.17) 12(1.4,-1.17) 13(1,-1.17) 14(0.6,-1.17) 15(0.2,-1.17) 16(-0.2,-1.17) 17(-0.6,-1.17) 18(-1,-1.17) 19(-1.4,-1.17) 20(-1.8,-1.17)
  silkscreen extent -2.44,-1.13 0.14,0.15
"DF40 - 70" [mm]
  rect 0.2x1.14 smd mask+0.05: 1(-6.8,1.17) 2(-6.4,1.17) 3(-6,1.17) 4(-5.6,1.17) 5(-5.2,1.17) 6(-4.8,1.17) 7(-4.4,1.17) 8(-4,1.17) 9(-3.6,1.17) 10(-3.2,1.17) 11(-2.8,1.17) 12(-2.4,1.17) 13(-2,1.17) 14(-1.6,1.17) 15(-1.2,1.17) 16(-0.8,1.17) 17(-0.4,1.17) 18(0,1.17) 19(0.4,1.17) 20(0.8,1.17) 21(1.2,1.17) 22(1.6,1.17) 23(2,1.17) 24(2.4,1.17) 25(2.8,1.17) 26(3.2,1.17) 27(3.6,1.17) 28(4,1.17) 29(4.4,1.17) 30(4.8,1.17) 31(5.2,1.17) 32(5.6,1.17) 33(6,1.17) 34(6.4,1.17) 35(6.8,1.17) 36(6.8,-1.17) 37(6.4,-1.17) 38(6,-1.17) 39(5.6,-1.17) 40(5.2,-1.17) 41(4.8,-1.17) 42(4.4,-1.17) 43(4,-1.17) 44(3.6,-1.17) 45(3.2,-1.17) 46(2.8,-1.17) 47(2.4,-1.17) 48(2,-1.17) 49(1.6,-1.17) 50(1.2,-1.17) 51(0.8,-1.17) 52(0.4,-1.17) 53(0,-1.17) 54(-0.4,-1.17) 55(-0.8,-1.17) 56(-1.2,-1.17) 57(-1.6,-1.17) 58(-2,-1.17) 59(-2.4,-1.17) 60(-2.8,-1.17) 61(-3.2,-1.17) 62(-3.6,-1.17) 63(-4,-1.17) 64(-4.4,-1.17) 65(-4.8,-1.17) 66(-5.2,-1.17) 67(-5.6,-1.17) 68(-6,-1.17) 69(-6.4,-1.17) 70(-6.8,-1.17)
  silkscreen extent -7.35,-0.15 0.15,1.17
DFN12 [mm]
  rect 0.6x0.25 smd: 1(-1.9,1.25) 2(-1.9,0.75) 3(-1.9,0.25) 4(-1.9,-0.25) 5(-1.9,-0.75) 6(-1.9,-1.25) 7(1.9,-1.25) 8(1.9,-0.75) 9(1.9,-0.25) 10(1.9,0.25) 11(1.9,0.75) 12(1.9,1.25)
  rect 2.6x3 smd: 13(0,0)
  silkscreen extent -2.1,-2 2,2.34
FXO-HC53 [mm]
  rect 1.24x1.29 smd: 1(0,-0.005) 2(2.54,-0.005) 3(2.54,2.245) 4(0,2.245)
INA826AIDRGR [mm]
  rect 0.28x0.95 smd mask+0.07: 1(0.753,0.079) 2(1.253,0.079) 3(1.753,0.079) 4(2.253,0.079) 5(2.253,2.929) 6(1.753,2.929) 7(1.253,2.929) 8(0.753,2.929)
  rect 2x1.2 smd mask+0.07: 5(1.5,1.5)
  silkscreen extent 0,0 3,3
JUMPER1PIN#1 [mm]
  round 1.4 hole 1: 0(1.4,1.115)
JUMPER1PIN#2 [mm]
  round 1.4 hole 0.4: 0(1.4,1.115)
LGA5x5 [mm] "LGA Package  25-Lead (6.25mm × 6.25mm × 1.82mm)"
  round 0.6 smd: A1(-2.54,2.54) A2(-1.27,2.54) A3(0,2.54) A4(1.27,2.54) A5(2.54,2.54) B1(-2.54,1.27) B2(-1.27,1.27) B3(0,1.27) B4(1.27,1.27) B5(2.54,1.27) C1(-2.54,0) C2(-1.27,0) C3(0,0) C4(1.27,0) C5(2.54,0) D1(-2.54,-1.27) D2(-1.27,-1.27) D3(0,-1.27) D4(1.27,-1.27) D5(2.54,-1.27) E1(-2.54,-2.54) E2(-1.27,-2.54) E3(0,-2.54) E4(1.27,-2.54) E5(2.54,-2.54)
  silkscreen extent -4.12,-3.13 3.13,4.12, body extent -3.13,-3.13 3.13,3.13, height 1.82
LQM21PN2R2MC0D [mm]
  rect 1.13x1.47 smd: 1(1.111,0.08) 2(-0.659,0.08)
  body extent -0.87,-0.64 1.33,0.81, height 1.05
LT3463 [mm]
  rect 0.25x0.675 smd mask+0.07: 1(0.5,0.087) 2(1,0.087) 3(1.5,0.087) 4(2,0.087) 5(2.5,0.087) 6(2.5,2.912) 7(2,2.912) 8(1.5,2.912) 9(1,2.912) 10(0.5,2.912)
  rrect10% 2.38x1.65 smd mask+0.07: PAD(1.5,1.5)
  silkscreen extent -0.01,0 3,3
M25P32-MLP8 [mm]
  rect 1x0.6 smd: 1(0.062,4.89) 2(0.062,3.62) 3(0.062,2.35) 4(0.062,1.08) 5(7.862,1.08) 6(7.862,2.35) 7(7.862,3.62) 8(7.862,4.89)
  rect 5.16x4.8 smd: 4(4.002,3)
  silkscreen extent 0,0 8,6
MLZ2012M100WT000 [mm]
  rect 0.8x1.2 smd: 1(0.006,-0.1) 2(1.806,-0.1)
OPA170-DRL [mm]
  rect 0.3x0.45 smd mask+0.05: 1(-0.056,-0.056) 2(0.444,-0.056) 3(0.944,-0.056) 4(0.944,1.294) 5(-0.056,1.294)
QFN24-3x3mm [mm] "QFN24 3x3mm"
  rect 0.5x0.27 smd: 1(-1.475,1) 6(-1.475,-1) 13(1.475,-1) 18(1.475,1)
  rect 0.55x0.27 smd: 2(-1.45,0.6) 3(-1.45,0.2) 4(-1.45,-0.2) 5(-1.45,-0.6) 14(1.449,-0.6) 15(1.449,-0.2) 16(1.449,0.2) 17(1.45,0.6)
  rect 0.27x0.5 smd: 7(-1,-1.475) 12(1,-1.475) 19(1,1.475) 24(-1,1.475)
  rect 0.27x0.55 smd: 8(-0.6,-1.45) 9(-0.2,-1.45) 10(0.2,-1.45) 11(0.6,-1.45) 20(0.6,1.449) 21(0.2,1.449) 22(-0.2,1.449) 23(-0.6,1.45)
  rect 1.54x1.54 smd: PAD(-0.025,0)
  silkscreen extent -1.88,-1.63 1.63,1.94, body extent -1.5,-1.5 1.5,1.5, height 1
Res_0402 [mm]
  rect 0.5x0.5 smd: 1(0.45,0.017) 2(-0.45,0.017)
  body extent -0.53,-0.26 0.52,0.29, height 0.5
RES_0603 [mm]
  rect 0.9x0.95 smd: 1(-0.85,0) 2(0.85,0)
  silkscreen extent -0.1,-0.38 0.1,0.38, body extent -0.85,-0.45 0.85,0.45, height 0.55
SMA_132134-10-ND [mm]
  round 1.73 smd: 0(-0.065,0)
  round 0.5 smd: 1(-2.591,2.413) 1(2.642,2.515)
  Top Layer region: 3.64,3.592 1.201,3.592 1.201,1.585 1.197,1.58 1.77,0.855 1.963,-0.048 1.738,-0.943 1.14,-1.647 1.14,-1.647 1.14,-3.607 3.629,-3.607 3.64,-3.597
  Top Layer region: -3.708,-3.607 -1.27,-3.607 -1.27,-1.6 -1.266,-1.595 -1.839,-0.871 -2.032,0.033 -1.807,0.928 -1.209,1.632 -1.209,1.632 -1.209,3.592 -3.698,3.592 -3.708,3.581
SOT23 [mm] "SOT23, 3-Leads, Body 2.90x2.45mm, Pitch 0.95mm, IPC Medium Density"
  rect 1.5x0.55 smd: 1(-0.95,0.95) 2(-0.95,-0.95) 3(0.95,0)
  silkscreen extent -1.07,-1.5 0.7,1.9, body extent -0.7,-1.5 0.7,1.5, height 1.1
TPS62231DRYT [mm]
  rect 0.3x0.52 smd paste+0 mask+0.05: 1(-0.469,-0.353)
  rect 0.3x0.49 smd paste+0 mask+0.05: 2(0.031,-0.353) 3(0.531,-0.353) 4(0.531,0.417) 5(0.031,0.417) 6(-0.469,0.417)
  silkscreen extent -0.97,-0.54 -0.87,-0.44, body extent -0.72,-0.49 0.78,0.56, height 0.6
TQFN24-4x4mm [mm] "TQFN24, 4x4mm AR"
  rect 0.55x0.32 smd: 1(-1.9,1.25) 2(-1.9,0.75) 3(-1.9,0.25) 4(-1.9,-0.25) 5(-1.9,-0.75) 6(-1.9,-1.25) 13(1.85,-1.25) 14(1.85,-0.75) 15(1.85,-0.25) 16(1.85,0.25) 17(1.85,0.75) 18(1.85,1.25)
  rect 0.32x0.55 smd: 7(-1.275,-1.875) 8(-0.775,-1.875) 9(-0.275,-1.875) 10(0.225,-1.875) 11(0.725,-1.875) 12(1.225,-1.875) 19(1.225,1.875) 20(0.725,1.875) 21(0.225,1.875) 22(-0.275,1.875) 23(-0.775,1.875) 24(-1.275,1.875)
  rect 2.9x2.9 smd: PAD(-0.025,0)
  silkscreen extent -2.3,-2 1.98,2.3, body extent -2,-2 2,2, height 1
VMT3 [mm]
  rect 0.37x0.5 smd: 1(-0.089,0.116) 2(0.711,0.116)
  rect 0.47x0.5 smd: 3(0.311,0.916)
WQFN16-3X3mm [mm] "WQFN16 3X3mm"
  rrect50% 0.85x0.28 smd: 1(-1.5,0.75) 2(-1.5,0.25) 3(-1.5,-0.25) 4(-1.5,-0.75) 9(1.5,-0.75) 10(1.5,-0.25) 11(1.5,0.25) 12(1.5,0.75)
  rrect50% 0.28x0.85 smd: 5(-0.75,-1.5) 6(-0.25,-1.5) 7(0.25,-1.5) 8(0.75,-1.5) 13(0.75,1.5) 14(0.25,1.5) 15(-0.25,1.5) 16(-0.75,1.5)
  rect 0.8x0.8 smd: PAD(0,0)
  silkscreen extent -1.8,-1.6 1.6,1.8, body extent -1.6,-1.6 1.6,1.6, height 0.8
WQFN32-DS90UB913A [mm]
  rect 0.6x0.25 smd mask+0: 1(-2.605,1.873) 2(-2.605,1.373) 3(-2.605,0.873) 4(-2.605,0.373) 5(-2.605,-0.127) 6(-2.605,-0.627) 7(-2.605,-1.127) 8(-2.605,-1.627) 17(2.195,-1.627) 18(2.195,-1.127) 19(2.195,-0.627) 20(2.195,-0.127) 21(2.195,0.373) 22(2.195,0.873) 23(2.195,1.373) 24(2.195,1.873)
  rect 0.25x0.6 smd mask+0: 9(-1.955,-2.277) 10(-1.455,-2.277) 11(-0.955,-2.277) 12(-0.455,-2.277) 13(0.045,-2.277) 14(0.545,-2.277) 15(1.045,-2.277) 16(1.545,-2.277) 25(1.545,2.523) 26(1.045,2.523) 27(0.545,2.523) 28(0.045,2.523) 29(-0.455,2.523) 30(-0.955,2.523) 31(-1.455,2.523) 32(-1.955,2.523)
  rect 3.1x3.1 smd paste-4: 33(-0.205,0.123)
  silkscreen extent -3.68,-2.58 2.49,2.82, body extent -2.76,-2.43 2.34,2.67, height 0.8

## Part data
C1 C2 C3 C4 C5 C6 C7 C8 C9 C10 C11 C12 C13 C14 C15 C16 C17 C18 C19 C20 C21 C22 C23 C24 C25 C26 C27 C28 C29 C30 C31 C32 C33 C34 C35 C36 C37 C38 C39 C40 C61 C62 C63 C64 C65 C66 C67 C68 C69 C70 C71 C72 C73 C74 C75 C76 C77 C78: library part Cap, "Capacitor"
C41 C42 C43 C44 C45 C46 C47 C48: "Capacitor"
C50: library part "Cap Pol3", "Polarized Capacitor (Surface Mount)"
C51 C52 C53 C54 C55 C56 C57: library part "Cap Semi", "Capacitor (Semiconductor SIM Model)"
C58 C59 C60: "Capacitor (Semiconductor SIM Model)"
D1: library part LED3, "Typical BLUE SiC LED"
Flash1: library part M25P16
FPGA1: "Spartan-6 LX 1.2V FPGA, 106 User I/Os, 196-Ball Chip-Scale BGA (0.5mm Pitch), Speed Grade 2, Commercial Grade, Pb-Free"
IMU1: "9-Axis IMU (Accel, Gyro, Magno)"
LD1 LD2: "16-Channel Constant Current LED Driver"
LD3: "256 Tap, Dual Channel Digital Potentiometer with SPI Interface and Non-Volatile Memory, -40 to 85 degC, 14-pin QFN (RUC14)"
R3 R4 R5 R6 R7 R8 R9 R10 R11 R12 R13 R14 R15 R16 R17 R18 R19 R20 R21 R22 R23 R24 R25 R26 R27 R28 R29 R33 R34 R35 R36 R37 R38 R39 R40 R41 R42 R43 R44 R45 R46: "Resistor"
R30 R31 R32: library part Res1, "Resistor"
U7: library part Component_1, "Low Noise Positive LDO"
U9: "DS90UR913ASERIALIZER"
U10: "Buck Step Down Regulator with 2.05 to 6 V Input and 1.8 V Output, -40 to 85 degC, 6-Pin SON (DRY), Green (RoHS & no Sb/Br)"

## Free pads (board coordinates)
  round 1.27 hole 1.27: 0(-9.5,8.89) 0(-8.89,-9.5) 0(8.89,9.5) 0(9.5,-8.89)

## Via types
v1: diameter 0.27, hole 0.15, Top Layer to Bottom Layer, tented both sides, 501 vias
v2: diameter 0.5, hole 0.2, Top Layer to Bottom Layer, tented both sides, 1 vias

## Nets (pads, with @x,y where several pads share a name; then routed paths per layer and width w, separated by ;. In a path a pad name is that pad's centre, name@x,y a point inside that pad or via, vN(x,y) a via of type N, cw(c..) or ccw(c..) an arc to the next point about the centre after c; other vN are vias at no path point)
+15V: AMP1.5 AMP2.8 C67.1 C72.1 C75.1 C78.2 PWR15.1 R40.2 SW1.4 T_+15V.0 | length 30.2
  MidLayer1 w0.13: T_+15V.0@8.3,-16.625 T_+15V.0@8.3,-16.325
  MidLayer1 w0.254: v1@1.15,-0.925 1.15,-1.6 5.875,-6.325 7.1,-6.325
  MidLayer1 w0.508: 7.1,-6.325 7.1,-8.914 5.175,-10.839 5.175,-11.75 6.575,-13.15 6.575,-14.6 T_+15V.0@8.3,-16.325
  Bottom Layer w0.13: C72.1@1.57,-2.92 C72.1@1.57,-2.779 ; C67.1@4.725,-10.85 4.725,-10.767 ; C67.1@5,-11.1 C67.1@5,-11.042 ; C78.2@8.328,-5.672 C78.2@8.4,-5.6
  Bottom Layer w0.254: C72.1@1.519,-2.894 AMP1.5@1.519,-1.944 ; C72.1@1.57,-2.92 2.075,-3.425 3.075,-3.425 C75.1@3.575,-2.925 ; R40.2@3.583,-9.625 4.725,-10.767 ; C67.1@4.868,-11.171 PWR15.1@6.4,-11.171 ; C67.1@4.998,-11.041 C67.1@5,-11.042 ; AMP2.8@7.029,-5.672 C78.2@8.328,-5.672 ; C78.2@8.225,-5.25 SW1.4@9.224,-5.25
  other v1: 4.346,-11.918 5.175,-11.8 5.121,-10.893 6.95,-6.35 7.346,-6.243 1.075,-1.35 1.075,-0.9
+VCOAX_5.5V: C50.2 C51.2 C56.2 C68.1 L5.2 L8.1 L9.1 PWR15.3 T_VCoax1.0 T_VCoax2.0 U7.1 U7.2 U7.3 U8.A2 U8.B2 U8.B3 U8.D2 U8.D3 U8.E2 | length 14.5
  Top Layer w0.13: C50.2@6.008,-3.717 C50.2@6.008,-3.594 ; C51.2@7.604,-3.416 C51.2@7.718,-3.302 C51.2@8.23,-3.302
  Top Layer w0.381: 4.825,-4.9 C50.2@6.008,-3.717
  Top Layer w0.508: C51.2@8.23,-3.302 10.211,-1.321 11.176,-1.321 11.927,-0.57 L5.2@11.927,-0.248
  Top Layer w1.016: C50.2@5.995,-3.416 C51.2@7.604,-3.416
  Bottom Layer w0.13: L9.1@6.075,-9.55 6.115,-9.51 L9.1@6.171,-9.454 ; C68.1@6.171,-8.231 C68.1@6.245,-8.231 ; C68.1@6.171,-8.157 C68.1@6.171,-7.825
  Bottom Layer w0.254: L8.1@5.05,-7.825 C68.1@6.171,-7.825 ; L9.1@6.1,-9.025 7.45,-10.375 PWR15.3@7.45,-11.087 ; L9.1@6.171,-9.454 L9.1@6.171,-9.25 ; L9.1@6.171,-9.025 C68.1@6.171,-8.231
  other v1: 2.65,-13.225 3.175,-13.225 3.75,-13.225 3.725,-12.775 2.65,-12.7 4.021,-8.268 4.921,-8.268 8.896,-4.893 8.4,-4.875 9.575,-4.85 9.2,-4.55 8.7,-4.5 7.696,-3.924 7.121,-3.518 7.696,-3.518 6.871,-2.893 7.371,-2.868
-15V: AMP1.2 AMP2.5 C65.2 C66.1 C73.1 C76.1 C77.2 D2.2 R38.1 SW1.7 T_-15V.0 | length 34.4
  MidLayer1 w0.254: v1@2.15,-0.9 2.425,-0.9 6.9,-5.375 9.8,-5.375
  MidLayer1 w0.508: 9.8,-5.375 11.375,-6.95 11.375,-13.775 10.675,-14.475
  Bottom Layer w0.13: C73.1@1.729,0.37 C73.1@1.749,0.35 ; AMP2.5@5.9,-4.2 AMP2.5@5.928,-4.172 ; C66.1@11.021,-15.018 C66.1@11.032,-15.029 C66.1@11.196,-15.029 ; SW1.7@11.25,-6.325 SW1.7@11.275,-6.3 ; T_-15V.0@14.275,-12.225 T_-15V.0@14.275,-12.15
  Bottom Layer w0.254: AMP1.2@2.019,-0.594 C73.1@2.019,0.2 ; AMP2.5@5.625,-4.05 6.28,-3.395 C76.1@6.28,-2.771 ; AMP2.5@5.928,-4.172 AMP2.5@7.029,-4.172 ; R38.1@6.858,-16.125 7.2,-16.125 7.625,-15.7 9.3,-15.7 C65.2@9.75,-15.25 ; 9.525,-15.4 9.818,-15.107 C65.2@9.818,-15.018 C66.1@11.021,-15.018 ; C66.1@11.196,-15.029 D2.2@11.95,-14.275 ; SW1.7@11.275,-6.3 SW1.7@11.924,-6.3 C77.2@12.975,-6.3
  Bottom Layer w0.508: 11.925,-14.575 T_-15V.0@14.275,-12.225
  other v1: 10.846,-14.668 10.421,-14.493 11.171,-14.318 11.296,-6.618 10.675,-6.55 11.021,-6.218 5.775,-4.525 6.275,-4.525 2.125,-0.9
AUXOUT_HSA_A: U1.4
AUXOUT_HSA_B: U2.4
C\S\_A+: FPGA1.B8 U1.12 | length 18
  Top Layer w0.13: FPGA1.B8@0.212,11.742 v1(0.47,12)
  MidLayer1 w0.13: v1(0.47,12) 0.47,14.52 1.575,15.625 7.8,15.625 12.425,11 v1@12.725,11
  Bottom Layer w0.13: U1.12@12.225,11 12.25,10.975 v1(12.75,10.975)
C\S\_A-: FPGA1.A8 U1.11 | length 18.1
  Top Layer w0.13: FPGA1.A8@0.212,12.242 0.212,14.762 v1(1.425,15.975)
  MidLayer1 w0.13: v1(1.425,15.975) 7.825,15.975 12.4,11.4 v1@12.7,11.4
  Bottom Layer w0.13: U1.11@12.05,11.4 12.055,11.405 v1(12.743,11.405)
C\S\_B+: FPGA1.B7 U2.12 | length 16.2
  Top Layer w0.13: v1(-0.525,11.975) -0.3,11.75 FPGA1.B7@-0.3,11.725
  MidLayer1 w0.13: v1@-11.036,12.751 -11.036,12.811 -8.522,15.325 -1.2,15.325 -0.525,14.65 v1(-0.525,11.975)
  Bottom Layer w0.13: U2.12@-11.014,11.476 v1@-11.014,12.764
  other v1: -11.056,12.779
C\S\_B-: FPGA1.A7 U2.11 | length 16.7
  Top Layer w0.13: v1(-0.85,15.55) v1@-0.85,15.622 ; v1@-0.825,15.525 -0.288,14.988 FPGA1.A7@-0.288,12.242
  MidLayer1 w0.13: v1@-11.439,12.75 -11.439,12.896 -8.735,15.6 -0.9,15.6 v1@-0.875,15.575
  Bottom Layer w0.13: U2.11@-11.422,11.495 v1@-11.422,12.783
  other v1: -11.48,12.798
DIN0: FPGA1.H2 U9.19 | length 11.3
  Top Layer w0.13: U9.19@-10.625,1.737 -10.625,2.425 -10.625,2.775 v1(-5.175,8.225) ; v1(-3.025,8.505) FPGA1.H2@-2.788,8.742
  MidLayer1 w0.13: v1(-5.175,8.225) -4.895,8.505 v1(-3.025,8.505)
DIN1: FPGA1.H1 U9.20 | length 11.4
  Top Layer w0.13: U9.20@-11.125,1.737 -11.125,2.8 -5.174,8.751 -3.298,8.751 FPGA1.H1@-3.288,8.742
DIN2: FPGA1.G2 U9.21 | length 12.6
  Top Layer w0.13: U9.21@-11.625,1.737 -11.625,2.85 v1(-5.725,8.75) ; v1(-3.025,9.005) FPGA1.G2@-2.788,9.242
  MidLayer1 w0.13: v1(-5.725,8.75) -5.47,9.005 v1(-3.025,9.005)
DIN3: FPGA1.G1 U9.22 | length 12.6
  Top Layer w0.13: U9.22@-12.125,1.737 -12.125,2.797 -5.681,9.242 FPGA1.G1@-3.288,9.242
DIN4: FPGA1.F2 U9.23 | length 13.7
  Top Layer w0.13: U9.23@-12.625,1.737 -12.625,2.717 v1(-5.917,9.425) ; v1(-3.025,9.5) -2.788,9.737 FPGA1.F2@-2.788,9.742
  MidLayer1 w0.13: v1@-5.867,9.475 v1@-3.05,9.475
  Bottom Layer w0.13: v1(-5.917,9.425) v1@-5.867,9.475 ; v1@-3.05,9.475 v1(-3.025,9.5)
DIN5: FPGA1.F1 U9.24 | length 13.7
  Top Layer w0.13: U9.24@-13.125,1.737 -13.125,2.686 -6.083,9.729 -3.301,9.729 FPGA1.F1@-3.288,9.742
DIN6: FPGA1.E2 U9.26 | length 16.8
  Top Layer w0.13: U9.26@-13.775,0.587 v1(-13.211,0.587) ; v1(-13.564,1.994) -13.564,2.807 v1(-6.366,10.005) ; v1(-3.025,10.005) FPGA1.E2@-2.788,10.242
  MidLayer1 w0.13: v1@-13.551,1.981 -13.551,1.359 -13.211,1.019 v1(-13.211,0.587) ; v1(-6.366,10.005) v1(-3.025,10.005)
DIN7: FPGA1.E1 U9.27 | length 19.7
  Top Layer w0.13: v1(-13.945,2.159) -13.945,2.816 -10.935,5.826 -10.935,9.615 -10.15,10.4 -3.45,10.4 -3.292,10.242 FPGA1.E1@-3.288,10.242 ; U9.27@-13.775,0.087 v1(-13.197,0.087)
  MidLayer1 w0.13: v1(-13.945,2.159) -13.945,0.835 v1(-13.197,0.087)
DIN8: FPGA1.D2 U9.29 | length 21.9
  Top Layer w0.13: U9.29@-13.775,-0.913 v1@-13.21,-0.913 ; v1@-3.025,10.505 FPGA1.D2@-2.788,10.742
  MidLayer1 w0.13: v1(-13.208,-0.914) -14.275,0.153 -14.275,2.875 -11.225,5.925 -11.225,9.725 -10.325,10.625 -3.199,10.625 v1@-3.049,10.475
  Bottom Layer w0.13: v1@-3.049,10.475 v1(-3.041,10.482)
DIN9: FPGA1.D1 T_D9.0 U9.30 | length 26.4
  Top Layer w0.13: T_D9.0@-18.215,3.8 -17.575,3.8 -17.047,3.272 -15.147,3.272 v1(-14.618,2.743) -14.618,2.934 -11.544,6.007 -11.544,9.856 -10.45,10.95 -3.497,10.95 FPGA1.D1@-3.288,10.742 ; U9.30@-13.775,-1.413 v1(-13.198,-1.413)
  MidLayer1 w0.13: v1@-14.618,2.629 -14.618,0.007 v1(-13.198,-1.413)
DIN10: FPGA1.C1 T_D10.0 U9.31 | length 27.6
  Top Layer w0.13: T_D10.0@-17.665,5.65 -16.083,5.65 v1(-14.297,3.864) ; v1@-14.285,3.853 -11.798,6.34 -11.798,10.027 -10.583,11.242 FPGA1.C1@-3.288,11.242 ; U9.31@-13.775,-1.913 v1@-13.2,-1.913
  MidLayer1 w0.13: v1@-14.298,3.84 -14.935,3.203 -14.935,-0.178 v1(-13.195,-1.918)
DIN11: FPGA1.B1 T_D11.0 U9.32 | length 28.9
  Top Layer w0.13: T_D11.0@-17.015,7.45 -17.015,7.236 v1(-14.224,4.445) -12.35,6.319 -12.35,9.925 -10.75,11.525 -3.505,11.525 FPGA1.B1@-3.288,11.742 ; U9.32@-13.775,-2.413 v1@-13.22,-2.413
  MidLayer1 w0.13: v1(-14.224,4.445) -15.253,3.416 -15.253,-0.356 v1(-13.208,-2.4)
ESTIM_OUT: AMP2.1 R43.2 SW1.1 T_ESTIM.0 | length 15.9
  Bottom Layer w0.13: AMP2.1@4.179,-5.672 4.357,-5.85
  Bottom Layer w0.254: R43.2@2.242,-5.375 2.242,-5.542 2.625,-5.925 4.432,-5.925 5.407,-6.9 SW1.1@9.1,-6.9 ; 8.7,-6.925 8.85,-6.925 11.625,-9.7 14.725,-9.7 T_ESTIM.0@15.325,-10.3
GCLK: C37.2 FPGA1.G14 U4.3 | length 8.1
  Top Layer w0.13: FPGA1.G14@3.2,9.225 v1(3.65,9.225)
  MidLayer1 w0.254: v1@3.725,9.2 5.025,9.2 7.65,6.575 8.45,6.575
  Bottom Layer w0.13: C37.2@7.85,6.225 C37.2@7.85,6.375
  Bottom Layer w0.254: v1@7.537,6.688 C37.2@7.85,6.375 ; U4.3@7.887,4.759 C37.2@7.887,6.033
  other v1: 8.55,6.675 7.525,6.7 8.075,6.7
GLOBALRESET: FPGA1.F14 J_RST.0 | length 14
  Top Layer w0.13: FPGA1.F14@3.25,9.75 4.3,9.75 6.425,7.625 14.15,7.625 J_RST.0@15.711,9.186